# Allegro board imx6 rex_v1i1.brd
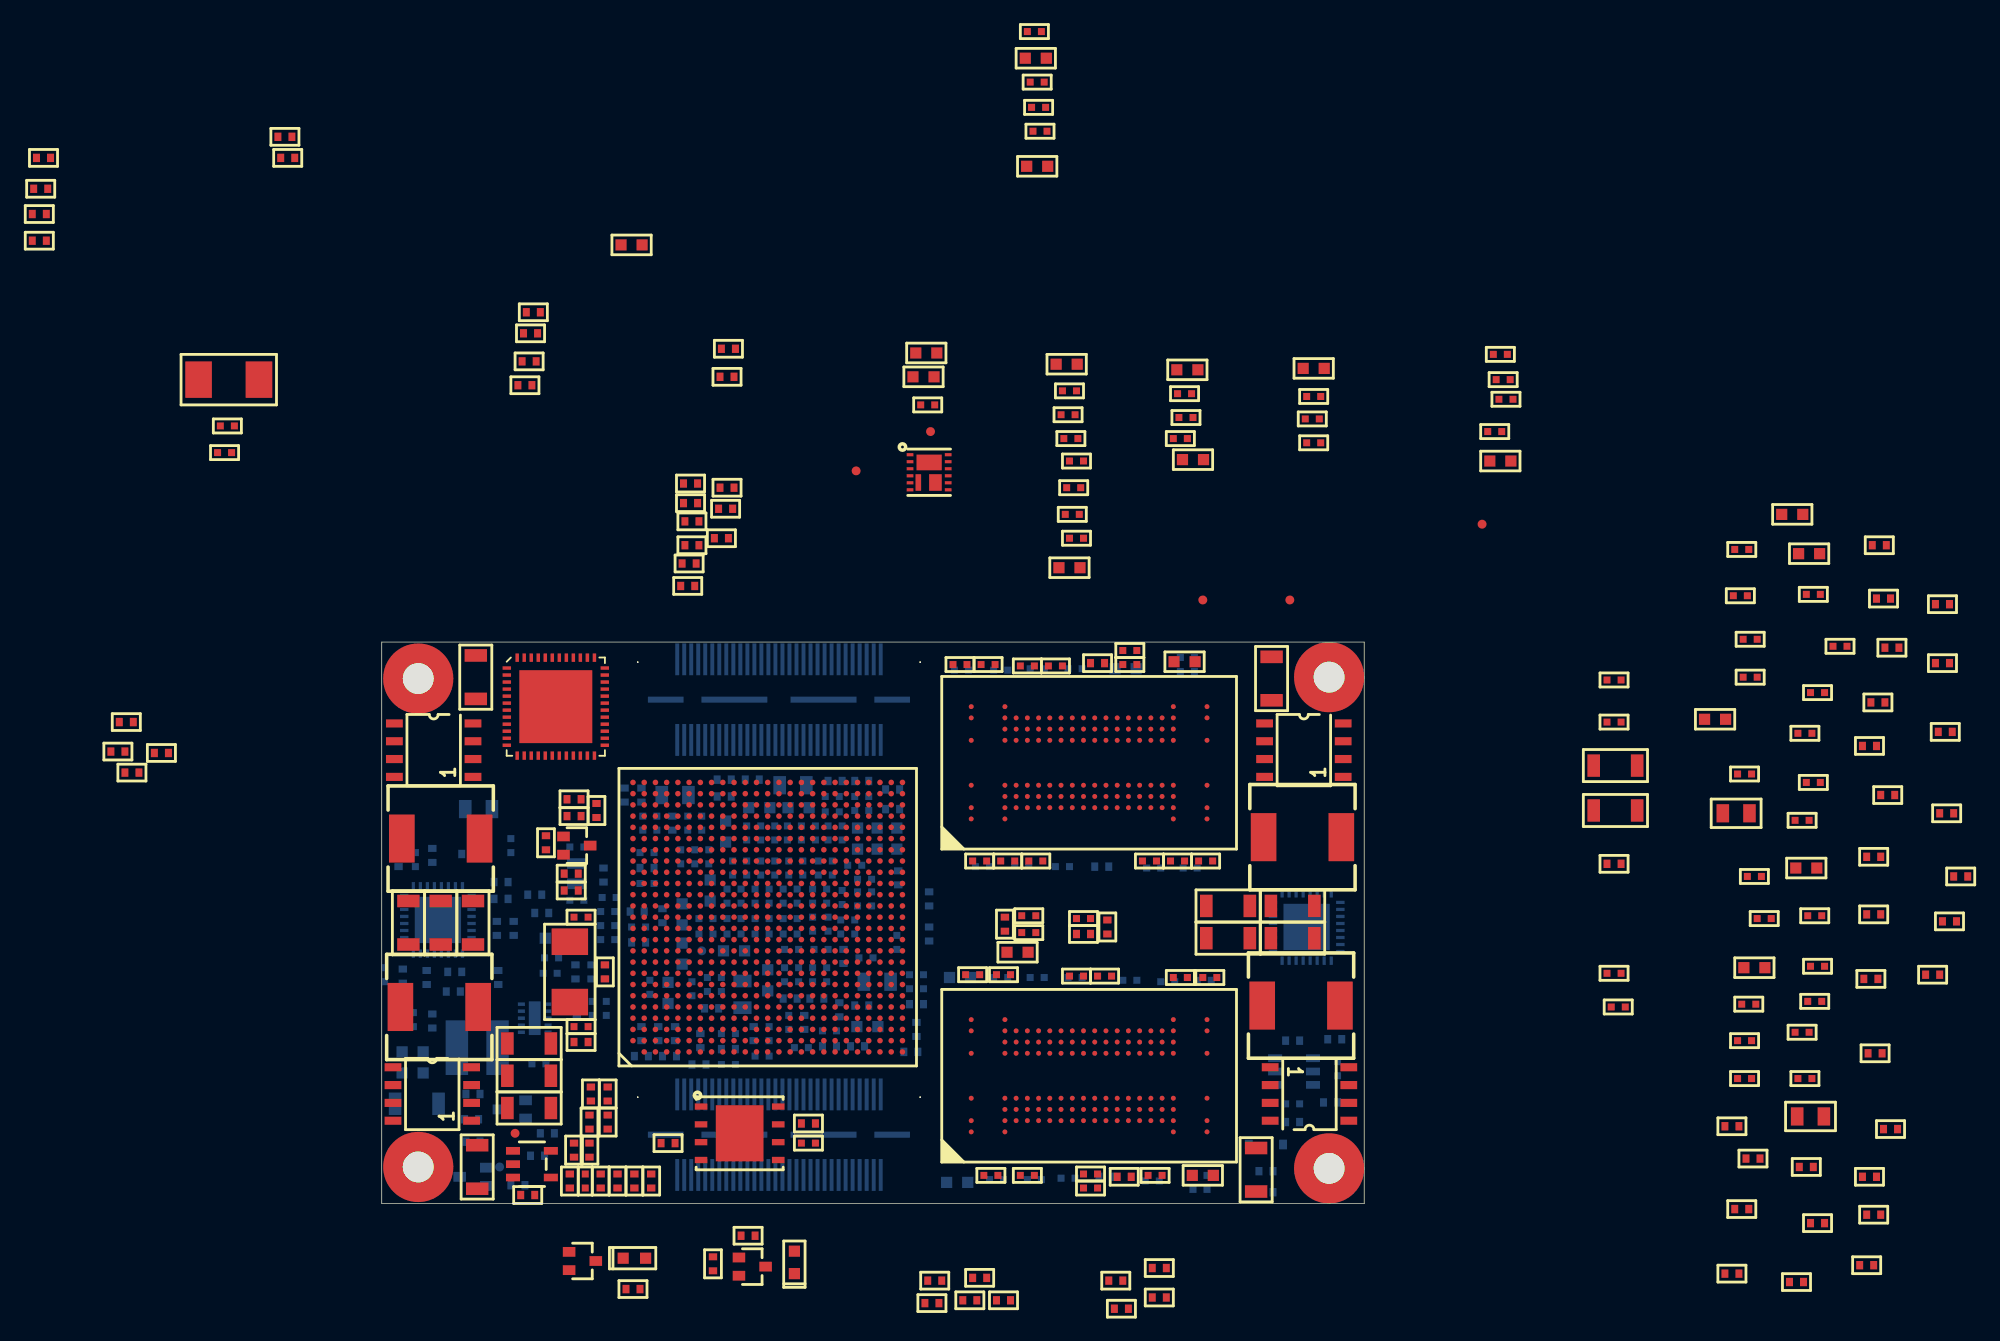
[diagram p0: board, top side]
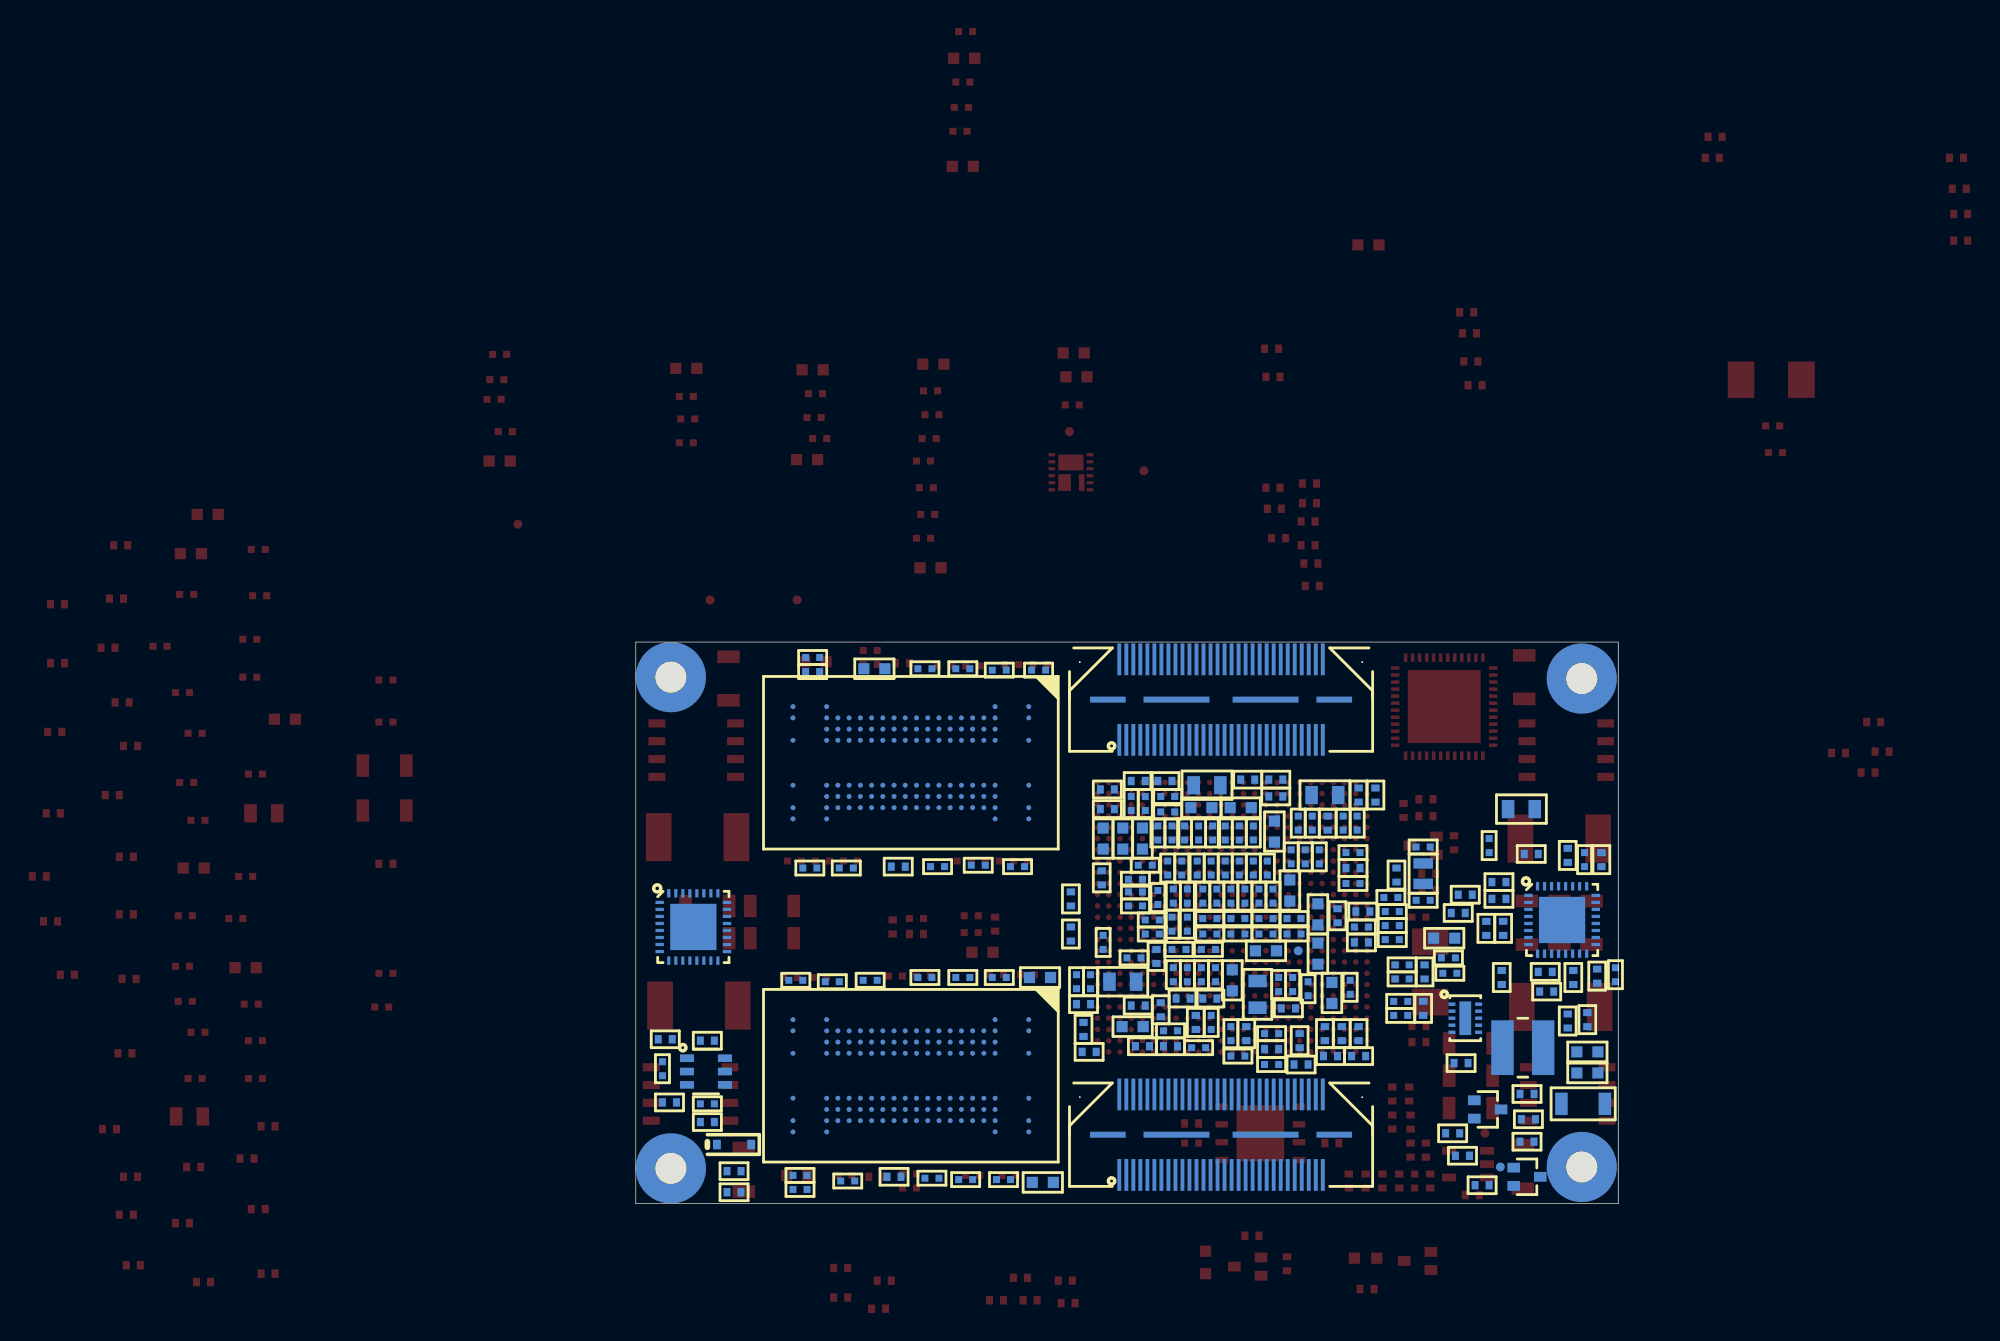
[diagram p1: board, bottom side, seen from below]

Outline 70 x 40 mm; copper layers: TOP, BOTTOM. Coordinates in mm from the lower left corner of the outline.
Outline path: 0,40 70,40 70,0 0,0 0,40

## Design rules (mm)
constraint set DEFAULT: min track width 0.127

## Placement (name value [footprint] x y rotation side)
C1  1u  [C0402]  88.1 14 0 top
C3  220n  [C0402]  50.5 1.1 0 top
C4  220n  [C0402]  50.5 2.1 0 top
C5  220n  [C0402]  58.3 1 180 bottom
C6  220n  [C0402]  58.3 2 180 bottom
C7  100n  [C0402]  36.7 18.6 270 bottom
C8  220n  [C0402]  53.3 38.4 0 top
C9  220n  [C0402]  53.3 39.4 0 top
C10  220n  [C0402]  57.4 37.9 0 bottom
C11  220n  [C0402]  57.4 38.9 0 bottom
C12  22u  [C0603]  41 1.5 180 bottom
C13  22u  [C0603]  41.2 16.1 180 bottom
C14  22u  [C0603]  53 38.1 180 bottom
C15  22u  [C0603]  100.5 49.1 0 top
C16  22u  [C0603]  58.5 2 0 top
C17  22u  [C0603]  57.2 38.6 0 top
C18  100n  [C0402]  96.9 46.6 0 top
C19  10u  [C0603]  101.7 46.3 0 top
C20  100n  [C0402]  96.8 43.3 0 top
C21  220n  [C0402]  43.2 38.4 0 top
C22  220n  [C0402]  41.2 38.4 0 top
C23  220n  [C0402]  58.7 24.4 0 top
C24  220n  [C0402]  56.7 24.4 0 top
C25  220n  [C0402]  54.7 24.4 0 top
C26  220n  [C0402]  46.6 24.4 0 top
C27  220n  [C0402]  44.6 24.4 0 top
C28  220n  [C0402]  42.6 24.4 0 top
C29  220n  [C0402]  46 38.3 0 top
C30  220n  [C0402]  48 38.3 0 top
C31  220n  [C0402]  57.6 23.9 180 bottom
C32  220n  [C0402]  55 23.9 180 bottom
C33  220n  [C0402]  48.5 24 180 bottom
C34  220n  [C0402]  45.6 24.1 180 bottom
C35  220n  [C0402]  42.8 24 180 bottom
C36  220n  [C0402]  102 43.4 0 top
C37  220n  [C0402]  41.3 38 180 bottom
C38  220n  [C0402]  44.1 38 180 bottom
C39  220n  [C0402]  46.7 38.1 180 bottom
C40  220n  [C0402]  49.4 38.1 180 bottom
C41  220n  [C0402]  42.1 16.3 0 top
C42  220n  [C0402]  44.3 16.3 0 top
C43  220n  [C0402]  49.5 16.2 0 top
C44  220n  [C0402]  51.5 16.2 0 top
C45  220n  [C0402]  56.9 16.1 0 top
C46  220n  [C0402]  59 16.1 0 top
C47  220n  [C0402]  97.5 40.2 0 top
C48  220n  [C0402]  43.4 2 0 top
C49  220n  [C0402]  46 2 0 top
C50  220n  [C0402]  55.1 2 0 top
C51  220n  [C0402]  58.6 15.9 180 bottom
C52  220n  [C0402]  56 15.8 180 bottom
C53  220n  [C0402]  53.3 15.9 180 bottom
C54  220n  [C0402]  54.9 1.6 180 bottom
C55  220n  [C0402]  48.9 1.8 180 bottom
C56  220n  [C0402]  46.5 1.7 180 bottom
C57  220n  [C0402]  43.8 1.7 180 bottom
C58  220n  [C0402]  44.1 16.1 180 bottom
C59  220n  [C0402]  46.7 16.1 180 bottom
C60  220n  [C0402]  49.4 16.1 180 bottom
C61  220n  [C0402]  46.1 19.3 0 top
C62  220n  [C0402]  103.9 39.7 0 top
C63  100n  [C0402]  15.5 14.4 180 bottom
C64  220n  [C0402]  97.5 37.5 0 top
C65  100n  [C0402]  15.5 13.4 180 bottom
C66  100n  [C0402]  15.4 17 180 bottom
C67  100n  [C0402]  15.4 16 180 bottom
C68  220n  [C0402]  18.3 19.7 0 bottom
C69  10n  [C0402]  16.2 21.8 180 bottom
C70  10n  [C0402]  16.1 20.8 180 bottom
C71  10n  [C0402]  16.1 19.8 180 bottom
C72  10n  [C0402]  16.1 18.8 180 bottom
C73  220n  [C0402]  18.9 22.8 180 bottom
C74  100n  [C0402]  24.7 9.9 180 bottom
C75  220n  [C0402]  27.6 12.1 270 bottom
C76  220n  [C0402]  31.9 12.3 180 bottom
C77  220n  [C0402]  37.6 15.8 90 bottom
C78  4u7  [C0402]  46.1 20.5 0 top
C79  220n  [C0402]  102.3 36.4 0 top
C80  10u  [C0603]  95 34.5 0 top
C81  220n  [C0402]  101.4 33.5 0 top
C82  220n  [C0402]  97.1 30.6 0 top
C83  18p  [C0402]  14.2 12.6 180 top
C84  18p  [C0402]  14.2 20.4 180 top
C85  18p  [C0402]  13.9 25.4 0 bottom
C86  18p  [C0402]  13.9 21.6 0 bottom
C87  100n  [C0402]  68.1 9.6 270 bottom
C88  100n  [C0402]  64.9 7.1 180 bottom
C89  100n  [C0402]  14.5 1.6 90 top
C90  220n  [C0402]  24.6 21.9 90 bottom
C91  220n  [C0402]  25.6 21.9 90 bottom
C92  220n  [C0402]  26.6 21.9 90 bottom
C93  220n  [C0402]  27.6 21.9 90 bottom
C94  220n  [C0402]  28.6 21.9 90 bottom
C95  220n  [C0402]  29.6 21.9 90 bottom
C96  22u  [C0603]  23.4 22.3 90 bottom
C97  220n  [C0402]  29.1 20.3 180 bottom
C98  220n  [C0402]  27.1 20.3 180 bottom
C99  220n  [C0402]  25.1 20.3 180 bottom
C100  220n  [C0402]  23.1 20.3 180 bottom
C101  22u  [C0603]  21.4 20.6 90 bottom
C102  220n  [C0402]  29.1 19.2 0 bottom
C103  220n  [C0402]  27.1 19.2 180 bottom
C104  220n  [C0402]  25.1 19.2 180 bottom
C105  220n  [C0402]  23.1 19.2 180 bottom
C106  22u  [C0603]  21.4 17.8 270 bottom
C107  220n  [C0402]  31.7 16.3 270 bottom
C108  220n  [C0402]  30.7 16.3 270 bottom
C109  220n  [C0402]  29.7 16.3 270 bottom
C110  220n  [C0402]  28.7 16.3 270 bottom
C111  22u  [C0603]  27.5 15.9 270 bottom
C112  220n  [C0402]  30.7 21.9 270 bottom
C113  220n  [C0402]  31.7 21.9 270 bottom
C114  220n  [C0402]  30.7 19.9 270 bottom
C115  220n  [C0402]  31.8 19.9 270 bottom
C116  220n  [C0402]  31.3 18.1 180 bottom
C117  220n  [C0402]  29.2 18.1 180 bottom
C118  22u  [C0603]  25.1 18 180 bottom
C119  220n  [C0402]  31.1 23.9 90 bottom
C120  220n  [C0402]  30 23.9 90 bottom
C121  220n  [C0402]  29 23.9 90 bottom
C122  220n  [C0402]  28 23.9 90 bottom
C123  220n  [C0402]  27 23.9 90 bottom
C124  220n  [C0402]  26 23.9 90 bottom
C125  220n  [C0402]  25 23.9 90 bottom
C126  220n  [C0402]  32.1 23.9 90 bottom
C127  22u  [C0603]  33.9 26 90 bottom
C128  22u  [C0603]  35.3 26 90 bottom
C129  22u  [C0603]  36.7 26 270 bottom
C130  220n  [C0402]  21.3 24.7 90 bottom
C131  220n  [C0402]  22.3 24.7 90 bottom
C132  220n  [C0402]  23.3 24.7 90 bottom
C133  220n  [C0402]  21.8 27.1 90 bottom
C134  220n  [C0402]  22.8 27.1 90 bottom
C135  22u  [C0603]  24.5 26.5 90 bottom
C136  220n  [C0402]  102 30 0 top
C137  22u  [C0805]  96.5 27.8 0 top
C138  220n  [C0402]  32.8 21.8 270 bottom
C139  10n  [C0402]  23.2 15.6 90 bottom
C140  220n  [C0402]  24.2 15.6 270 bottom
C141  22u  [C0805]  25.7 14.9 270 bottom
C142  220n  [C0402]  101.2 27.3 0 top
C143  220n  [C0402]  22.1 15.3 90 bottom
C144  220n  [C0402]  32.8 26.4 90 bottom
C145  220n  [C0402]  29 12.9 270 bottom
C146  220n  [C0402]  30.9 26.4 90 bottom
C147  22u  [C0805]  20.9 29.1 180 bottom
C148  22u  [C0805]  29.3 29.8 180 bottom
C149  220n  [C0402]  24.7 12.1 0 bottom
C150  220n  [C0402]  19.1 15.4 270 bottom
C151  22u  [C0603]  20.4 15 270 bottom
C152  220n  [C0402]  19.6 27.1 90 bottom
C153  220n  [C0402]  18.6 27.1 90 bottom
C154  220n  [C0402]  97.8 23.3 0 top
C155  220n  [C0402]  34.5 17.5 0 bottom
C156  22u  [C0805]  35.3 15.8 0 bottom
C157  220n  [C0402]  33.7 24.1 180 bottom
C158  220n  [C0402]  34.4 23.1 180 bottom
C159  220n  [C0402]  34.4 22.2 180 bottom
C160  220n  [C0402]  34.4 21.2 180 bottom
C161  220n  [C0402]  33.2 20.2 180 bottom
C162  220n  [C0402]  33.2 19.2 180 bottom
C163  220n  [C0402]  32.1 27.9 0 bottom
C164  220n  [C0402]  32.1 29 180 bottom
C165  220n  [C0402]  33.7 28.5 270 bottom
C166  220n  [C0402]  31.8 26.4 90 bottom
C167  220n  [C0402]  29.9 26.4 270 bottom
C168  220n  [C0402]  28.9 26.4 270 bottom
C169  220n  [C0402]  28 26.4 90 bottom
C170  220n  [C0402]  27 26.4 270 bottom
C171  220n  [C0402]  26 26.4 270 bottom
C172  22u  [C0603]  26.9 28.2 180 bottom
C173  22u  [C0603]  29.7 28.2 180 bottom
C174  220n  [C0402]  34.7 28.5 270 bottom
C175  22pF  [C0402]  -11 55.4 0 top
C176  22pF  [C0402]  -11.2 53.5 0 top
C177  10u  [C0603]  38.8 60.6 0 top
C178  10u  [C0603]  38.6 58.9 0 top
C179  560pF  [C0402]  38.9 56.9 0 top
C180  10u  [C0603]  48.8 59.8 0 top
C181  100n  [C0402]  49 57.9 0 top
C182  10n  [C0402]  48.9 56.2 0 top
C183  10n  [C0402]  49.1 54.5 0 top
C184  10n  [C0402]  49.5 52.9 0 top
C185  10n  [C0402]  49.3 51 0 top
C186  10u  [C0603]  57.4 59.4 0 top
C187  100n  [C0402]  57.2 57.7 0 top
C188  10n  [C0402]  57.3 56 0 top
C189  10n  [C0402]  56.9 54.5 0 top
C190  100n  [C0402]  46.5 83.5 0 top
C191  10u  [C0603]  66.4 59.5 0 top
C192  100n  [C0402]  66.4 57.5 0 top
C193  10n  [C0402]  66.3 55.9 0 top
C194  10u  [C0603]  101.5 23.9 0 top
C195  100n  [C0402]  79.7 60.5 0 top
C196  10n  [C0402]  79.9 58.7 0 top
C197  10n  [C0402]  80.1 57.3 0 top
C198  10n  [C0402]  79.3 55 0 top
C199  10u  [C0603]  46.6 81.6 0 top
C200  10n  [C0402]  46.7 79.9 0 top
C201  10n  [C0402]  46.8 78.1 0 top
C202  10n  [C0402]  46.9 76.4 0 top
C203  100n  [C0402]  30.4 4.3 0 top
C204  10u  [C0603]  12.4 18.9 180 bottom
C205  100n  [C0402]  12.1 17.5 180 bottom
C206  1u  [C0402]  9.2 25.5 270 bottom
C207  1u  [C0402]  12 16.4 180 bottom
C211  100n  [C0402]  0.2 16.3 270 bottom
C212  100n  [C0402]  2.4 24.5 270 bottom
C218  10n  [C0402]  98.5 20.3 0 top
C219  100n  [C0402]  102.1 20.5 0 top
C221  10u  [C0603]  2.2 10.8 180 bottom
C222  10u  [C0603]  2.2 9.3 180 bottom
C223  10u  [C0603]  97.8 16.8 0 top
C224  100n  [C0402]  102.3 16.9 0 top
C225  1u  [C0402]  97.4 14.2 0 top
C226  1u  [C0402]  102.1 14.4 0 top
C230  100n  [C0402]  101.2 12.2 0 top
C231  100n  [C0402]  97.1 11.6 0 top
C237  10n  [C0402]  97.1 8.9 0 top
C238  100n  [C0402]  101.4 8.9 0 top
C239  100n  [C0402]  87.8 37.3 0 top
C240  100n  [C0402]  87.8 34.3 0 top
C242  100n  [C0402]  87.8 16.4 0 top
C243  4u7  [C0402]  38.6 15.8 270 bottom
C244  4u7  [C0402]  50 20.3 0 top
C245  4u7  [C0402]  18.9 25 180 bottom
C246  4u7  [C0402]  27.1 10.5 180 bottom
C247  4u7  [C0402]  29.9 11.1 180 bottom
C248  10n  [C0402]  49.2 49.1 0 top
C249  10n  [C0402]  49.5 47.4 0 top
C250  10uF  [C1206]  87.9 31.2 0 top
C251  10uF  [C1206]  87.9 28 0 top
C252  1uF  [C0805]  6.9 28.1 180 bottom
C253  10uF  [C1206]  6.7 37.5 90 top
C254  10uF  [C1206]  6.8 2.6 270 top
C255  10uF  [C1206]  2.5 7.1 180 bottom
C256  1uF  [C0805]  101.8 6.2 0 top
C257  10uF  [C1206]  62.3 2.4 270 top
C258  10uF  [C1206]  63.4 37.4 90 top
C259  100u  [C1206]  6.5 20 270 top
C260  100u  [C1206]  1.9 20 270 top
C261  100u  [C1206]  4.2 20 270 top
C262  100u  [C1206]  10.5 6.8 0 top
C263  100u  [C1206]  10.5 9.1 0 top
C264  100u  [C1206]  10.5 11.4 0 top
C265  100u  [C1206]  60.3 18.9 180 top
C266  100u  [C1206]  64.9 18.9 0 top
C267  100u  [C1206]  60.3 21.2 180 top
C268  100u  [C1206]  64.9 21.2 0 top
D1  RB751V-40-TP  [SOD323]  63 4.2 180 bottom
D2  Green  [LED_0603]  18 -3.9 0 top
D3  Orange  [LED_0603]  29.4 -4.2 90 top
FB1  220R, 2.5A  [C0603]  45.3 17.9 0 top
FB2  220R, 2.5A  [C0603]  34.6 12.6 0 bottom
FB3  BLM18KG101TN1D  [C0603]  49 45.3 0 top
FB4  BLM18KG101TN1D  [C0603]  57.8 53 0 top
FB5  BLM15AX601SN1D  [C0402]  66.4 54.2 0 top
FB6  BLM18KG101TN1D  [C0603]  79.7 52.9 0 top
FB7  BLM18KG101TN1D  [C0603]  46.7 73.9 0 top
FB8  220R, 2.5A  [C0603]  17.8 68.3 0 top
J1  NA  [QSH-030-01-L-D-A]  28.3 35.9 90 bottom
J2  NA  [QSH-030-01-L-D-A]  28.3 4.9 90 bottom
L2  3u3  [IHLP_255MILX270MIL]  4.1 14 0 top
L3  VLCF4020T-100MR85  [VLCF4020]  6.8 11.1 180 bottom
L4  3u3  [IHLP_255MILX270MIL]  65.5 14.1 0 top
L5  3u3  [IHLP_255MILX270MIL]  65.6 26.1 180 top
L6  4u7  [IHLP_255MILX270MIL]  4.2 26 0 top
MH1  MH_5MMC_2.2MMD  [MH_5MMD_2_2MMD]  2.6 37.4 0 top
MH2  MH_5MMC_2.2MMD  [MH_5MMD_2_2MMD]  67.5 37.5 0 top
MH3  MH_5MMC_2.2MMD  [MH_5MMD_2_2MMD]  67.5 2.5 0 top
MH4  MH_5MMC_2.2MMD  [MH_5MMD_2_2MMD]  2.6 2.6 0 top
Q1  2N7002BKW,115  [SC70_SOT323]  14.3 -4.1 0 top
Q2  2N7002BKW,115  [SC70_SOT323]  26.4 -4.5 0 top
Q3  SI4816BDY-T1-GE3  [8_SOIC_3_9MM]  3.7 32.3 0 top
Q4  SI4816BDY-T1-GE3  [8_SOIC_3_9MM]  3.6 7.8 0 top
Q5  2N7002BKW,115  [SC70_SOT323]  6.5 1.9 180 bottom
Q6  SI4816BDY-T1-GE3  [8_SOIC_3_9MM]  65.7 32.3 0 top
Q7  SI4816BDY-T1-GE3  [8_SOIC_3_9MM]  66.1 7.8 180 top
Q8  2N7002BKW,115  [SC70_SOT323]  9.3 6.7 180 bottom
Q9  2N7002BKW,115  [SC70_SOT323]  13.9 25.5 0 top
R1  22R  [R0402]  26.4 30.2 180 bottom
R2  200R  [R0402]  39 21.7 270 bottom
R3  200R  [R0402]  39 19.2 270 bottom
R4  240R  [R0402]  52.9 1.9 0 top
R5  240R  [R0402]  51.6 1.9 180 bottom
R8  240R  [R0402]  51 38.5 0 top
R9  240R  [R0402]  51.3 24 180 bottom
R10  240R  [R0402]  36.8 23.2 90 bottom
R11  240R  [R0402]  96.2 5.5 0 top
R12  240R  [R0402]  97.7 3.2 0 top
R13  0R  [R0402]  44.4 19.9 90 top
R14  0R  [R0402]  50 19.2 0 top
R15  200R  [R0402]  51.7 19.7 90 top
R16  49R9  [R0402]  13.8 16.5 270 bottom
R17  49R9  [R0402]  13.9 13.9 270 bottom
R18  0R  [R0402]  18.2 20.8 180 bottom
R19  0R  [R0402]  18.9 23.9 180 bottom
R20  191R  [R0402]  18.3 18.6 180 bottom
R21  47k  [R0402]  20.5 10.5 180 bottom
R22  47k  [R0402]  18.5 10.5 180 bottom
R23  0R  [R0402]  26.5 12.1 270 bottom
R24  0R  [R0402]  37.7 10.8 180 bottom
R25  0R  [R0402]  38.1 12.4 270 bottom
R26  0R  [R0402]  22.6 9.9 180 bottom
R27  0R  [R0402]  31.9 11.2 180 bottom
R28  4k99  [R0402]  31 14.6 180 bottom
R29  4k99  [R0402]  29.1 14.6 180 bottom
R30  1k6  [R0402]  33.9 11.2 180 bottom
R31  4k99  [R0402]  18 1.6 90 top
R32  4k99  [R0402]  16.8 1.6 90 top
R34  0R  [R0402]  38.1 14.2 180 bottom
R35  22R  [R0402]  24.7 60.9 0 top
R36  22R  [R0402]  10.8 63.5 0 top
R37  2M2  [R0402]  14.2 11.5 180 top
R44  4k99  [R0402]  55.4 -4.6 0 top
R45  4k99  [R0402]  55.4 -6.7 0 top
R46  4k99  [R0402]  -18.8 32.2 0 top
R47  4k99  [R0402]  -15.7 32.1 0 top
R50  22R  [R0402]  24.4 30.2 180 bottom
R51  0R  [R0402]  63 2.3 180 bottom
R52  22R  [R0402]  39.4 -5.5 0 top
R53  10M  [R0402]  15.9 16.5 90 top
R54  10M  [R0402]  15.8 23.4 270 bottom
R55  4k99  [R0402]  13.7 27.6 0 top
R56  4k99  [R0402]  13.5 23.5 0 top
R59  4k99  [R0402]  64.9 11.6 180 bottom
R61  1k  [R0402]  101.5 2.6 0 top
R65  0R  [R0402]  63 0.8 180 bottom
R66  22R  [R0402]  39.2 -7.1 0 top
R70  0R  [R0402]  67.6 7.2 180 bottom
R71  0R  [R0402]  13.4 1.6 90 top
R72  22R  [R0402]  -18.2 34.3 0 top
R73  100k  [R0402]  20 20.5 90 bottom
R74  0R  [R0402]  34.2 14.1 0 bottom
R76  0R  [R0402]  30.1 12.9 270 bottom
R77  2R2  [R0402]  19.7 12.1 90 bottom
R78  0R  [R0402]  24.7 11 180 bottom
R80  0R  [R0402]  20.7 27.1 270 bottom
R81  220R  [R0402]  10.6 62 0 top
R82  220R  [R0402]  10.5 60 0 top
R83  22R  [R0402]  102.3 -1.4 0 top
R84  4k99  [R0402]  10.2 58.3 0 top
R85  22R  [R0402]  -6.9 76 0 top
R86  22R  [R0402]  -6.7 74.5 0 top
R87  4k99  [R0402]  -24.1 74.5 0 top
R88  0R  [R0402]  24.6 58.9 0 top
R89  4k99  [R0402]  -24.3 72.3 0 top
R90  22R  [R0402]  16.1 7.8 90 top
R92  22R  [R0402]  14.9 7.8 90 top
R93  0R  [R0402]  6.5 7.8 180 bottom
R99  1k  [R0402]  22 51.3 0 top
R101  1k  [R0402]  22 49.9 0 top
R102  1k  [R0402]  22.1 48.6 0 top
R105  0R  [R0402]  20.9 12.1 270 bottom
R106  0R  [R0402]  11.2 10 180 bottom
R107  0R  [R0402]  3.6 13 90 bottom
R108  0R  [R0402]  2.2 13.1 90 bottom
R111  100k  [R0402]  36.4 29.5 180 bottom
R112  22R  [R0402]  52.3 -5.5 0 top
R113  220R  [R0402]  17.9 -6.1 0 top
R114  220R  [R0402]  26.1 -2.3 0 top
R116  0R  [R0402]  10.9 22 180 bottom
R117  0R  [R0402]  96.9 -0.4 0 top
R119  14K  [R0402]  8.2 19.6 90 bottom
R120  4k99  [R0402]  6.2 24.9 180 bottom
R121  1R  [R0402]  1.2 24.5 90 bottom
R122  1R  [R0402]  1.5 16.2 90 bottom
R123  39k  [R0402]  5.1 15.1 0 bottom
R124  200k  [R0402]  106 1.9 0 top
R125  200k  [R0402]  3.2 16.1 90 bottom
R126  10k5  [R0402]  5.2 16.5 180 bottom
R128  0R  [R0402]  8.5 21.7 0 bottom
R134  12k  [R0402]  106.3 -0.8 0 top
R135  3k3  [R0402]  105.8 -4.4 0 top
R137  100k  [R0402]  36.4 28.1 180 bottom
R138  330k  [R0402]  6.4 6 180 bottom
R139  120k  [R0402]  11.1 3.4 180 bottom
R140  0R  [R0402]  100.8 -5.6 0 top
R141  0R  [R0402]  96.2 -5 0 top
R143  100k  [R0402]  32.3 30.1 180 bottom
R144  100k  [R0402]  34.2 30.1 180 bottom
R145  1R  [R0402]  107.5 5.3 0 top
R146  1R  [R0402]  106.4 10.7 0 top
R147  27k  [R0402]  106.1 16 0 top
R148  200k  [R0402]  106.3 20.6 0 top
R149  200k  [R0402]  106.3 24.7 0 top
R150  10k5  [R0402]  107.3 29.1 0 top
R152  0R  [R0402]  106 32.6 0 top
R156  0R  [R0402]  106.6 35.7 0 top
R157  0R  [R0402]  107.6 39.6 0 top
R159  22R  [R0402]  52.7 -7.5 0 top
R160  22R  [R0402]  -17.8 30.7 0 top
R161  22R  [R0402]  22.7 11.6 270 bottom
R162  1k  [R0402]  -24.4 70.5 0 top
R163  0R  [R0402]  107 43.1 0 top
R164  0R  [R0402]  106.7 46.9 0 top
R165  10k  [R0402]  32.9 17.6 90 bottom
R166  10k  [R0402]  32.6 13.8 90 bottom
R167  10k  [R0402]  15.6 1.6 90 top
R168  10k  [R0402]  111.2 42.7 0 top
R169  10k  [R0402]  24.4 29 180 bottom
R170  10k  [R0402]  18.5 29.1 270 bottom
R171  10k  [R0402]  17.3 29.1 270 bottom
R172  10k  [R0402]  42.6 -5.3 0 top
R173  10k  [R0402]  41.9 -6.9 0 top
R174  10k  [R0402]  44.3 -6.9 0 top
R175  10k  [R0402]  23.5 13.9 180 bottom
R176  10k  [R0402]  111.2 38.5 0 top
R177  10k  [R0402]  13.7 28.8 0 top
R178  10k  [R0402]  15.3 28 90 top
R179  10k  [R0402]  13.5 22.3 0 top
R180  10k  [R0402]  11.7 25.7 270 top
R181  10k  [R0402]  67.9 11.7 180 bottom
R182  10k  [R0402]  19.2 1.6 90 top
R183  10k  [R0402]  64.9 5.8 180 bottom
R184  10k  [R0402]  10.4 0.6 0 top
R185  10k  [R0402]  13.7 3.8 90 top
R186  10k  [R0402]  16.1 5.8 90 top
R187  10k  [R0402]  14.8 5.8 90 top
R188  10k  [R0402]  14.8 3.8 90 top
R189  10k  [R0402]  18.5 12.1 90 bottom
R190  10k  [R0402]  -24.4 68.6 0 top
R191  10k  [R0402]  22.1 46.9 0 top
R192  10k  [R0402]  21.9 45.6 0 top
R193  10k  [R0402]  21.8 44 0 top
R194  10k  [R0402]  24.6 51 0 top
R195  10k  [R0402]  24.5 49.5 0 top
R196  10k  [R0402]  24.2 47.4 0 top
R197  10k  [R0402]  30.4 5.7 0 top
R198  10k  [R0402]  20.4 4.3 0 top
R199  10k  [R0402]  23.6 -4.3 90 top
R200  10k  [R0402]  11.4 20.7 180 bottom
R201  10k  [R0402]  8.3 16.1 270 bottom
R202  10k  [R0402]  3.6 24.8 90 bottom
R203  10k  [R0402]  11.8 5 180 bottom
R204  10k  [R0402]  9.7 1.3 180 bottom
R205  10k  [R0402]  6.5 4.4 180 bottom
R206  10k  [R0402]  8.5 22.9 180 bottom
R207  10k  [R0402]  9.4 19.6 90 bottom
R208  10k  [R0402]  111.4 33.6 0 top
R209  10k  [R0402]  111.5 27.8 0 top
R210  10k  [R0402]  112.5 23.3 0 top
R211  10k  [R0402]  111.7 20.1 0 top
R212  10k  [R0402]  110.5 16.3 0 top
R213  10k  [R0402]  87.8 24.2 0 top
TP3  TP_25MILC_TP3  [TP_25C]  22.8 18 180 bottom
TP5  TP_25MILC_TP5  [TP_25C]  39.1 55 0 top
TP6  TP_25MILC_TP6  [TP_25C]  33.8 52.2 0 top
TP7  TP_25MILC_TP7  [TP_25C]  9.5 5 0 top
TP8  TP_25MILC_TP8  [TP_25C]  78.4 48.4 0 top
TP9  TP_25MILC_TP9  [TP_25C]  58.5 43 0 top
TP10  TP_25MILC_TP10  [TP_25C]  64.7 43 0 top
TP11  TP_25MILC_TP11  [TP_25C]  8.4 2.6 180 bottom
U1  MCIMX6Q5EYM10AC  [PBGA624]  27.5 20.4 90 top
U2  MT41J128M16HA15EDTR  [96_FPGA_DD3]  50.4 9.1 90 top
U3  MT41J128M16HA15EDTR  [96_FPGA_DD3]  50.4 9.1 270 bottom
U4  MT41J128M16HA15EDTR  [96_FPGA_DD3]  50.4 31.4 90 top
U5  MT41J128M16HA15EDTR  [96_FPGA_DD3]  50.4 31.4 270 bottom
U6  TPS3808G09DBVR_U6  [DBV_SOT_23_6]  65 9.4 180 bottom
U7  SN74AHC1G09DBVR  [DBV_SOT_23_5]  10.7 2.8 0 top
U8  KSZ9021RN  [QFN48_7MMX7MM]  12.4 35.4 0 top
U9  MIC33050-4YHL TR  [MLF_3X3_12PINS]  39 52.1 0 top
U10  SST25VF016B-75-4I-QAF-ND  [WSON8_6X5MM]  25.5 5 0 top
U11  ISL6236AIRZ  [32_VFQFN_EXPOSED_PAD]  4 20.2 180 bottom
U12  TPS62175DQCT_U12  [DQC_PWSON-N10]  10.9 13.2 180 bottom
U13  ISL6236AIRZ  [32_VFQFN_EXPOSED_PAD]  65.9 19.7 180 bottom
Y1  24MHz  [ABM7_V1_1]  13.4 16.5 90 top
Y2  32.768kHz  [ABS06]  13.9 23.5 270 bottom
Y3  25MHz  [ABM7_V1_1]  -10.9 58.7 0 top

## Library data of the parts
C1 = C1005X5R1C105K_C1: User Part Number: .PARTNO; Tolerance: .TOL
C3 = C1005X5R1E224M_C3: User Part Number: .PARTNO; Tolerance: .TOL
C4 = C1005X5R1E224M_C4: User Part Number: .PARTNO; Tolerance: .TOL
C5 = C1005X5R1E224M_C5: User Part Number: .PARTNO; Tolerance: .TOL
C6 = C1005X5R1E224M_C6: User Part Number: .PARTNO; Tolerance: .TOL
C7 = C1005X5R1H104K_C7: User Part Number: .PARTNO; Tolerance: .TOL
C8 = C1005X5R1E224M_C8: User Part Number: .PARTNO; Tolerance: .TOL
C9 = C1005X5R1E224M_C9: User Part Number: .PARTNO; Tolerance: .TOL
C10 = C1005X5R1E224M_C10: User Part Number: .PARTNO; Tolerance: .TOL
C11 = C1005X5R1E224M_C11: User Part Number: .PARTNO; Tolerance: .TOL
C12-C17 C96 C101 C106 C111 C118 C127-C129 C135 C151 C172 C173 = GRM188R60G226MEA0L: User Part Number: .PARTNO; Tolerance: .TOL
C18 = C1005X5R1H104K_C18: User Part Number: .PARTNO; Tolerance: .TOL
C19 = C1608X5R0J106M_C19: User Part Number: .PARTNO; Tolerance: .TOL
C20 = C1005X5R1H104K_C20: User Part Number: .PARTNO; Tolerance: .TOL
C21 = C1005X5R1E224M_C21: User Part Number: .PARTNO; Tolerance: .TOL
C22 = C1005X5R1E224M_C22: User Part Number: .PARTNO; Tolerance: .TOL
C23 = C1005X5R1E224M_C23: User Part Number: .PARTNO; Tolerance: .TOL
C24 = C1005X5R1E224M_C24: User Part Number: .PARTNO; Tolerance: .TOL
C25 = C1005X5R1E224M_C25: User Part Number: .PARTNO; Tolerance: .TOL
C26 = C1005X5R1E224M_C26: User Part Number: .PARTNO; Tolerance: .TOL
C27 = C1005X5R1E224M_C27: User Part Number: .PARTNO; Tolerance: .TOL
C28 = C1005X5R1E224M_C28: User Part Number: .PARTNO; Tolerance: .TOL
C29 = C1005X5R1E224M_C29: User Part Number: .PARTNO; Tolerance: .TOL
C30 = C1005X5R1E224M_C30: User Part Number: .PARTNO; Tolerance: .TOL
C31 = C1005X5R1E224M_C31: User Part Number: .PARTNO; Tolerance: .TOL
C32 = C1005X5R1E224M_C32: User Part Number: .PARTNO; Tolerance: .TOL
C33 = C1005X5R1E224M_C33: User Part Number: .PARTNO; Tolerance: .TOL
C34 = C1005X5R1E224M_C34: User Part Number: .PARTNO; Tolerance: .TOL
C35 = C1005X5R1E224M_C35: User Part Number: .PARTNO; Tolerance: .TOL
C36 = C1005X5R1E224M_C36: User Part Number: .PARTNO; Tolerance: .TOL
C37 = C1005X5R1E224M_C37: User Part Number: .PARTNO; Tolerance: .TOL
C38 = C1005X5R1E224M_C38: User Part Number: .PARTNO; Tolerance: .TOL
C39 = C1005X5R1E224M_C39: User Part Number: .PARTNO; Tolerance: .TOL
C40 = C1005X5R1E224M_C40: User Part Number: .PARTNO; Tolerance: .TOL
C41 = C1005X5R1E224M_C41: User Part Number: .PARTNO; Tolerance: .TOL
C42 = C1005X5R1E224M_C42: User Part Number: .PARTNO; Tolerance: .TOL
C43 = C1005X5R1E224M_C43: User Part Number: .PARTNO; Tolerance: .TOL
C44 = C1005X5R1E224M_C44: User Part Number: .PARTNO; Tolerance: .TOL
C45 = C1005X5R1E224M_C45: User Part Number: .PARTNO; Tolerance: .TOL
C46 = C1005X5R1E224M_C46: User Part Number: .PARTNO; Tolerance: .TOL
C47 = C1005X5R1E224M_C47: User Part Number: .PARTNO; Tolerance: .TOL
C48 = C1005X5R1E224M_C48: User Part Number: .PARTNO; Tolerance: .TOL
C49 = C1005X5R1E224M_C49: User Part Number: .PARTNO; Tolerance: .TOL
C50 = C1005X5R1E224M_C50: User Part Number: .PARTNO; Tolerance: .TOL
C51 = C1005X5R1E224M_C51: User Part Number: .PARTNO; Tolerance: .TOL
C52 = C1005X5R1E224M_C52: User Part Number: .PARTNO; Tolerance: .TOL
C53 = C1005X5R1E224M_C53: User Part Number: .PARTNO; Tolerance: .TOL
C54 = C1005X5R1E224M_C54: User Part Number: .PARTNO; Tolerance: .TOL
C55 = C1005X5R1E224M_C55: User Part Number: .PARTNO; Tolerance: .TOL
C56 = C1005X5R1E224M_C56: User Part Number: .PARTNO; Tolerance: .TOL
C57 = C1005X5R1E224M_C57: User Part Number: .PARTNO; Tolerance: .TOL
C58 = C1005X5R1E224M_C58: User Part Number: .PARTNO; Tolerance: .TOL
C59 = C1005X5R1E224M_C59: User Part Number: .PARTNO; Tolerance: .TOL
C60 = C1005X5R1E224M_C60: User Part Number: .PARTNO; Tolerance: .TOL
C61 = C1005X5R1E224M_C61: User Part Number: .PARTNO; Tolerance: .TOL
C62 = C1005X5R1E224M_C62: User Part Number: .PARTNO; Tolerance: .TOL
C63 = C1005X5R1H104K_C63: User Part Number: .PARTNO; Tolerance: .TOL
C64 = C1005X5R1E224M_C64: User Part Number: .PARTNO; Tolerance: .TOL
C65 = C1005X5R1H104K_C65: User Part Number: .PARTNO; Tolerance: .TOL
C66 = C1005X5R1H104K_C66: User Part Number: .PARTNO; Tolerance: .TOL
C67 = C1005X5R1H104K_C67: User Part Number: .PARTNO; Tolerance: .TOL
C68 = C1005X5R1E224M_C68: User Part Number: .PARTNO; Tolerance: .TOL
C69 = C1005X7R1C103K_C69: User Part Number: .PARTNO; Tolerance: .TOL
C70 = C1005X7R1C103K_C70: User Part Number: .PARTNO; Tolerance: .TOL
C71 = C1005X7R1C103K_C71: User Part Number: .PARTNO; Tolerance: .TOL
C72 = C1005X7R1C103K_C72: User Part Number: .PARTNO; Tolerance: .TOL
C73 = C1005X5R1E224M_C73: User Part Number: .PARTNO; Tolerance: .TOL
C74 = C1005X5R1H104K_C74: User Part Number: .PARTNO; Tolerance: .TOL
C75 = C1005X5R1E224M_C75: User Part Number: .PARTNO; Tolerance: .TOL
C76 = C1005X5R1E224M_C76: User Part Number: .PARTNO; Tolerance: .TOL
C77 = C1005X5R1E224M_C77: User Part Number: .PARTNO; Tolerance: .TOL
C78 = C1005X5R1A475M_C78: User Part Number: .PARTNO; Tolerance: .TOL
C79 = C1005X5R1E224M_C79: User Part Number: .PARTNO; Tolerance: .TOL
C80 = C1608X5R0J106M_C80: User Part Number: .PARTNO; Tolerance: .TOL
C81 = C1005X5R1E224M_C81: User Part Number: .PARTNO; Tolerance: .TOL
C82 = C1005X5R1E224M_C82: User Part Number: .PARTNO; Tolerance: .TOL
C83 = C1005C0G1H180J_C83: User Part Number: .PARTNO; Tolerance: .TOL
C84 = C1005C0G1H180J_C84: User Part Number: .PARTNO; Tolerance: .TOL
C85 = C1005C0G1H180J_C85: User Part Number: .PARTNO; Tolerance: .TOL
C86 = C1005C0G1H180J_C86: User Part Number: .PARTNO; Tolerance: .TOL
C87 = C1005X5R1H104K_C87: User Part Number: .PARTNO; Tolerance: .TOL
C88 = C1005X5R1H104K_C88: User Part Number: .PARTNO; Tolerance: .TOL
C89 = C1005X5R1H104K_C89: User Part Number: .PARTNO; Tolerance: .TOL
C90 = C1005X5R1E224M_C90: User Part Number: .PARTNO; Tolerance: .TOL
C91 = C1005X5R1E224M_C91: User Part Number: .PARTNO; Tolerance: .TOL
C92 = C1005X5R1E224M_C92: User Part Number: .PARTNO; Tolerance: .TOL
C93 = C1005X5R1E224M_C93: User Part Number: .PARTNO; Tolerance: .TOL
C94 = C1005X5R1E224M_C94: User Part Number: .PARTNO; Tolerance: .TOL
C95 = C1005X5R1E224M_C95: User Part Number: .PARTNO; Tolerance: .TOL
C97 = C1005X5R1E224M_C97: User Part Number: .PARTNO; Tolerance: .TOL
C98 = C1005X5R1E224M_C98: User Part Number: .PARTNO; Tolerance: .TOL
C99 = C1005X5R1E224M_C99: User Part Number: .PARTNO; Tolerance: .TOL
C100 = C1005X5R1E224M_C100: User Part Number: .PARTNO; Tolerance: .TOL
C102 = C1005X5R1E224M_C102: User Part Number: .PARTNO; Tolerance: .TOL
C103 = C1005X5R1E224M_C103: User Part Number: .PARTNO; Tolerance: .TOL
C104 = C1005X5R1E224M_C104: User Part Number: .PARTNO; Tolerance: .TOL
C105 = C1005X5R1E224M_C105: User Part Number: .PARTNO; Tolerance: .TOL
C107 = C1005X5R1E224M_C107: User Part Number: .PARTNO; Tolerance: .TOL
C108 = C1005X5R1E224M_C108: User Part Number: .PARTNO; Tolerance: .TOL
C109 = C1005X5R1E224M_C109: User Part Number: .PARTNO; Tolerance: .TOL
C110 = C1005X5R1E224M_C110: User Part Number: .PARTNO; Tolerance: .TOL
C112 = C1005X5R1E224M_C112: User Part Number: .PARTNO; Tolerance: .TOL
C113 = C1005X5R1E224M_C113: User Part Number: .PARTNO; Tolerance: .TOL
C114 = C1005X5R1E224M_C114: User Part Number: .PARTNO; Tolerance: .TOL
C115 = C1005X5R1E224M_C115: User Part Number: .PARTNO; Tolerance: .TOL
C116 = C1005X5R1E224M_C116: User Part Number: .PARTNO; Tolerance: .TOL
C117 = C1005X5R1E224M_C117: User Part Number: .PARTNO; Tolerance: .TOL
C119 = C1005X5R1E224M_C119: User Part Number: .PARTNO; Tolerance: .TOL
C120 = C1005X5R1E224M_C120: User Part Number: .PARTNO; Tolerance: .TOL
C121 = C1005X5R1E224M_C121: User Part Number: .PARTNO; Tolerance: .TOL
C122 = C1005X5R1E224M_C122: User Part Number: .PARTNO; Tolerance: .TOL
C123 = C1005X5R1E224M_C123: User Part Number: .PARTNO; Tolerance: .TOL
C124 = C1005X5R1E224M_C124: User Part Number: .PARTNO; Tolerance: .TOL
C125 = C1005X5R1E224M_C125: User Part Number: .PARTNO; Tolerance: .TOL
C126 = C1005X5R1E224M_C126: User Part Number: .PARTNO; Tolerance: .TOL
C130 = C1005X5R1E224M_C130: User Part Number: .PARTNO; Tolerance: .TOL
C131 = C1005X5R1E224M_C131: User Part Number: .PARTNO; Tolerance: .TOL
C132 = C1005X5R1E224M_C132: User Part Number: .PARTNO; Tolerance: .TOL
C133 = C1005X5R1E224M_C133: User Part Number: .PARTNO; Tolerance: .TOL
C134 = C1005X5R1E224M_C134: User Part Number: .PARTNO; Tolerance: .TOL
C136 = C1005X5R1E224M_C136: User Part Number: .PARTNO; Tolerance: .TOL
C137 = C2012X5R1C226K_C137: User Part Number: .PARTNO; Tolerance: .TOL
C138 = C1005X5R1E224M_C138: User Part Number: .PARTNO; Tolerance: .TOL
C139 = C1005X7R1C103K_C139: User Part Number: .PARTNO; Tolerance: .TOL
C140 = C1005X5R1E224M_C140: User Part Number: .PARTNO; Tolerance: .TOL
C141 = C2012X5R1C226K_C141: User Part Number: .PARTNO; Tolerance: .TOL
C142 = C1005X5R1E224M_C142: User Part Number: .PARTNO; Tolerance: .TOL
C143 = C1005X5R1E224M_C143: User Part Number: .PARTNO; Tolerance: .TOL
C144 = C1005X5R1E224M_C144: User Part Number: .PARTNO; Tolerance: .TOL
C145 = C1005X5R1E224M_C145: User Part Number: .PARTNO; Tolerance: .TOL
C146 = C1005X5R1E224M_C146: User Part Number: .PARTNO; Tolerance: .TOL
C147 = C2012X5R1C226K_C147: User Part Number: .PARTNO; Tolerance: .TOL
C148 = C2012X5R1C226K_C148: User Part Number: .PARTNO; Tolerance: .TOL
C149 = C1005X5R1E224M_C149: User Part Number: .PARTNO; Tolerance: .TOL
C150 = C1005X5R1E224M_C150: User Part Number: .PARTNO; Tolerance: .TOL
C152 = C1005X5R1E224M_C152: User Part Number: .PARTNO; Tolerance: .TOL
C153 = C1005X5R1E224M_C153: User Part Number: .PARTNO; Tolerance: .TOL
C154 = C1005X5R1E224M_C154: User Part Number: .PARTNO; Tolerance: .TOL
C155 = C1005X5R1E224M_C155: User Part Number: .PARTNO; Tolerance: .TOL
C156 = C2012X5R1C226K_C156: User Part Number: .PARTNO; Tolerance: .TOL
C157 = C1005X5R1E224M_C157: User Part Number: .PARTNO; Tolerance: .TOL
C158 = C1005X5R1E224M_C158: User Part Number: .PARTNO; Tolerance: .TOL
C159 = C1005X5R1E224M_C159: User Part Number: .PARTNO; Tolerance: .TOL
C160 = C1005X5R1E224M_C160: User Part Number: .PARTNO; Tolerance: .TOL
C161 = C1005X5R1E224M_C161: User Part Number: .PARTNO; Tolerance: .TOL
C162 = C1005X5R1E224M_C162: User Part Number: .PARTNO; Tolerance: .TOL
C163 = C1005X5R1E224M_C163: User Part Number: .PARTNO; Tolerance: .TOL
C164 = C1005X5R1E224M_C164: User Part Number: .PARTNO; Tolerance: .TOL
C165 = C1005X5R1E224M_C165: User Part Number: .PARTNO; Tolerance: .TOL
C166 = C1005X5R1E224M_C166: User Part Number: .PARTNO; Tolerance: .TOL
C167 = C1005X5R1E224M_C167: User Part Number: .PARTNO; Tolerance: .TOL
C168 = C1005X5R1E224M_C168: User Part Number: .PARTNO; Tolerance: .TOL
C169 = C1005X5R1E224M_C169: User Part Number: .PARTNO; Tolerance: .TOL
C170 = C1005X5R1E224M_C170: User Part Number: .PARTNO; Tolerance: .TOL
C171 = C1005X5R1E224M_C171: User Part Number: .PARTNO; Tolerance: .TOL
C174 = C1005X5R1E224M_C174: User Part Number: .PARTNO; Tolerance: .TOL
C175 = C1005C0G1H220J_C175: User Part Number: .PARTNO; Tolerance: .TOL
C176 = C1005C0G1H220J_C176: User Part Number: .PARTNO; Tolerance: .TOL
C177 = C1608X5R0J106M_C177: User Part Number: .PARTNO; Tolerance: .TOL
C178 = C1608X5R0J106M_C178: User Part Number: .PARTNO; Tolerance: .TOL
C179 = GRM1555C1H561JA01D_C179: User Part Number: .PARTNO; Tolerance: .TOL
C180 = C1608X5R0J106M_C180: User Part Number: .PARTNO; Tolerance: .TOL
C181 = C1005X5R1H104K_C181: User Part Number: .PARTNO; Tolerance: .TOL
C182 = C1005X7R1C103K_C182: User Part Number: .PARTNO; Tolerance: .TOL
C183 = C1005X7R1C103K_C183: User Part Number: .PARTNO; Tolerance: .TOL
C184 = C1005X7R1C103K_C184: User Part Number: .PARTNO; Tolerance: .TOL
C185 = C1005X7R1C103K_C185: User Part Number: .PARTNO; Tolerance: .TOL
C186 = C1608X5R0J106M_C186: User Part Number: .PARTNO; Tolerance: .TOL
C187 = C1005X5R1H104K_C187: User Part Number: .PARTNO; Tolerance: .TOL
C188 = C1005X7R1C103K_C188: User Part Number: .PARTNO; Tolerance: .TOL
C189 = C1005X7R1C103K_C189: User Part Number: .PARTNO; Tolerance: .TOL
C190 = C1005X5R1H104K_C190: User Part Number: .PARTNO; Tolerance: .TOL
C191 = C1608X5R0J106M_C191: User Part Number: .PARTNO; Tolerance: .TOL
C192 = C1005X5R1H104K_C192: User Part Number: .PARTNO; Tolerance: .TOL
C193 = C1005X7R1C103K_C193: User Part Number: .PARTNO; Tolerance: .TOL
C194 = C1608X5R0J106M_C194: User Part Number: .PARTNO; Tolerance: .TOL
C195 = C1005X5R1H104K_C195: User Part Number: .PARTNO; Tolerance: .TOL
C196 = C1005X7R1C103K_C196: User Part Number: .PARTNO; Tolerance: .TOL
C197 = C1005X7R1C103K_C197: User Part Number: .PARTNO; Tolerance: .TOL
C198 = C1005X7R1C103K_C198: User Part Number: .PARTNO; Tolerance: .TOL
C199 = C1608X5R0J106M_C199: User Part Number: .PARTNO; Tolerance: .TOL
C200 = C1005X7R1C103K_C200: User Part Number: .PARTNO; Tolerance: .TOL
C201 = C1005X7R1C103K_C201: User Part Number: .PARTNO; Tolerance: .TOL
C202 = C1005X7R1C103K_C202: User Part Number: .PARTNO; Tolerance: .TOL
C203 = C1005X5R1H104K_C203: User Part Number: .PARTNO; Tolerance: .TOL
C204 = C1608X5R0J106M_C204: User Part Number: .PARTNO; Tolerance: .TOL
C205 = C1005X5R1H104K_C205: User Part Number: .PARTNO; Tolerance: .TOL
C206 = C1005X5R1C105K_C206: User Part Number: .PARTNO; Tolerance: .TOL
C207 = C1005X5R1C105K_C207: User Part Number: .PARTNO; Tolerance: .TOL
C211 = C1005X5R1H104K_C211: User Part Number: .PARTNO; Tolerance: .TOL
C212 = C1005X5R1H104K_C212: User Part Number: .PARTNO; Tolerance: .TOL
C218 = C1005X7R1C103K_C218: User Part Number: .PARTNO; Tolerance: .TOL
C219 = C1005X5R1H104K_C219: User Part Number: .PARTNO; Tolerance: .TOL
C221 = C1608X5R0J106M_C221: User Part Number: .PARTNO; Tolerance: .TOL
C222 = C1608X5R0J106M_C222: User Part Number: .PARTNO; Tolerance: .TOL
C223 = C1608X5R0J106M_C223: User Part Number: .PARTNO; Tolerance: .TOL
C224 = C1005X5R1H104K_C224: User Part Number: .PARTNO; Tolerance: .TOL
C225 = C1005X5R1C105K_C225: User Part Number: .PARTNO; Tolerance: .TOL
C226 = C1005X5R1C105K_C226: User Part Number: .PARTNO; Tolerance: .TOL
C230 = C1005X5R1H104K_C230: User Part Number: .PARTNO; Tolerance: .TOL
C231 = C1005X5R1H104K_C231: User Part Number: .PARTNO; Tolerance: .TOL
C237 = C1005X7R1C103K_C237: User Part Number: .PARTNO; Tolerance: .TOL
C238 = C1005X5R1H104K_C238: User Part Number: .PARTNO; Tolerance: .TOL
C239 = C1005X5R1H104K_C239: User Part Number: .PARTNO; Tolerance: .TOL
C240 = C1005X5R1H104K_C240: User Part Number: .PARTNO; Tolerance: .TOL
C242 = C1005X5R1H104K_C242: User Part Number: .PARTNO; Tolerance: .TOL
C243 = C1005X5R1A475M_C243: User Part Number: .PARTNO; Tolerance: .TOL
C244 = C1005X5R1A475M_C244: User Part Number: .PARTNO; Tolerance: .TOL
C245 = C1005X5R1A475M_C245: User Part Number: .PARTNO; Tolerance: .TOL
C246 = C1005X5R1A475M_C246: User Part Number: .PARTNO; Tolerance: .TOL
C247 = C1005X5R1A475M_C247: User Part Number: .PARTNO; Tolerance: .TOL
C248 = C1005X7R1C103K_C248: User Part Number: .PARTNO; Tolerance: .TOL
C249 = C1005X7R1C103K_C249: User Part Number: .PARTNO; Tolerance: .TOL
C250 C251 C253-C255 C257 C258 = GRM31CR6YA106KA12L: User Part Number: .PARTNO; Tolerance: .TOL
C252 C256 = GRM21BR71H105KA12L: User Part Number: .PARTNO; Tolerance: .TOL
C259-C268 = C3216X5R1A107M: User Part Number: .PARTNO; Tolerance: .TOL
D1 = RB751V-40-TP_D1: User Part Number: .PARTNO; Tolerance: .TOL
D2 = LG L29K-G2J1-24-Z_D2: User Part Number: .PARTNO; Tolerance: .TOL
D3 = LO L29K-H2K1-24-Z_D3: User Part Number: .PARTNO; Tolerance: .TOL
FB1 = BLM18SG221TN1D_FB1: User Part Number: .PARTNO; Tolerance: .TOL
FB2 = BLM18SG221TN1D_FB2: User Part Number: .PARTNO; Tolerance: .TOL
FB3 = BLM18KG101TN1D_FB3: User Part Number: .PARTNO; Tolerance: .TOL
FB4 = BLM18KG101TN1D_FB4: User Part Number: .PARTNO; Tolerance: .TOL
FB5 = BLM15AX601SN1D_FB5: User Part Number: .PARTNO; Tolerance: .TOL
FB6 = BLM18KG101TN1D_FB6: User Part Number: .PARTNO; Tolerance: .TOL
FB7 = BLM18KG101TN1D_FB7: User Part Number: .PARTNO; Tolerance: .TOL
FB8 = BLM18SG221TN1D_FB8: User Part Number: .PARTNO; Tolerance: .TOL
J1 J2 = QSH-030-01-L-D-A: User Part Number: .PARTNO; Tolerance: .TOL
L2 L4 L5 = IHLP2525CZER3R3M01: User Part Number: .PARTNO; Tolerance: .TOL
L3 = VLCF4020T-100MR85_L3: User Part Number: .PARTNO; Tolerance: .TOL
L6 = IHLP2525CZER4R7M01: User Part Number: .PARTNO; Tolerance: .TOL
MH1-MH4 = MH_5MMC_2.2MMD: User Part Number: .PARTNO; Tolerance: .TOL
Q1 = 2N7002BKW,115_Q1: User Part Number: .PARTNO; Tolerance: .TOL
Q2 = 2N7002BKW,115_Q2: User Part Number: .PARTNO; Tolerance: .TOL
Q3 = SI4816BDY-T1-GE3_Q3: User Part Number: .PARTNO; Tolerance: .TOL
Q4 = SI4816BDY-T1-GE3_Q4: User Part Number: .PARTNO; Tolerance: .TOL
Q5 = 2N7002BKW,115_Q5: User Part Number: .PARTNO; Tolerance: .TOL
Q6 = SI4816BDY-T1-GE3_Q6: User Part Number: .PARTNO; Tolerance: .TOL
Q7 = SI4816BDY-T1-GE3_Q7: User Part Number: .PARTNO; Tolerance: .TOL
Q8 = 2N7002BKW,115_Q8: User Part Number: .PARTNO; Tolerance: .TOL
Q9 = 2N7002BKW,115_Q9: User Part Number: .PARTNO; Tolerance: .TOL
R1 = RC0402FR-0722RL_R1: User Part Number: .PARTNO; Tolerance: .TOL
R2 = CRCW0402200RFKED_R2: User Part Number: .PARTNO; Tolerance: .TOL
R3 = CRCW0402200RFKED_R3: User Part Number: .PARTNO; Tolerance: .TOL
R4 = RMCF0402FT240R_R4: User Part Number: .PARTNO; Tolerance: .TOL
R5 = RMCF0402FT240R_R5: User Part Number: .PARTNO; Tolerance: .TOL
R8 = RMCF0402FT240R_R8: User Part Number: .PARTNO; Tolerance: .TOL
R9 = RMCF0402FT240R_R9: User Part Number: .PARTNO; Tolerance: .TOL
R10 = RMCF0402FT240R_R10: User Part Number: .PARTNO; Tolerance: .TOL
R11 = RMCF0402FT240R_R11: User Part Number: .PARTNO; Tolerance: .TOL
R12 = RMCF0402FT240R_R12: User Part Number: .PARTNO; Tolerance: .TOL
R13 = RC0402JR-070RL_R13: User Part Number: .PARTNO; Tolerance: .TOL
R14 = RC0402JR-070RL_R14: User Part Number: .PARTNO; Tolerance: .TOL
R15 = CRCW0402200RFKED_R15: User Part Number: .PARTNO; Tolerance: .TOL
R16 = RC0402FR-0749R9L_R16: User Part Number: .PARTNO; Tolerance: .TOL
R17 = RC0402FR-0749R9L_R17: User Part Number: .PARTNO; Tolerance: .TOL
R18 = RC0402JR-070RL_R18: User Part Number: .PARTNO; Tolerance: .TOL
R19 = RC0402JR-070RL_R19: User Part Number: .PARTNO; Tolerance: .TOL
R20 = CRCW0402191RFKED_R20: User Part Number: .PARTNO; Tolerance: .TOL
R21 = RC0402FR-0747KL_R21: User Part Number: .PARTNO; Tolerance: .TOL
R22 = RC0402FR-0747KL_R22: User Part Number: .PARTNO; Tolerance: .TOL
R23 = RC0402JR-070RL_R23: User Part Number: .PARTNO; Tolerance: .TOL
R24 = RC0402JR-070RL_R24: User Part Number: .PARTNO; Tolerance: .TOL
R25 = RC0402JR-070RL_R25: User Part Number: .PARTNO; Tolerance: .TOL
R26 = RC0402JR-070RL_R26: User Part Number: .PARTNO; Tolerance: .TOL
R27 = RC0402JR-070RL_R27: User Part Number: .PARTNO; Tolerance: .TOL
R28 = RMCF0402FT4K99_R28: User Part Number: .PARTNO; Tolerance: .TOL
R29 = RMCF0402FT4K99_R29: User Part Number: .PARTNO; Tolerance: .TOL
R30 = ERJ-2RKF1601X_R30: User Part Number: .PARTNO; Tolerance: .TOL
R31 = RMCF0402FT4K99_R31: User Part Number: .PARTNO; Tolerance: .TOL
R32 = RMCF0402FT4K99_R32: User Part Number: .PARTNO; Tolerance: .TOL
R34 = RC0402JR-070RL_R34: User Part Number: .PARTNO; Tolerance: .TOL
R35 = RC0402FR-0722RL_R35: User Part Number: .PARTNO; Tolerance: .TOL
R36 = RC0402FR-0722RL_R36: User Part Number: .PARTNO; Tolerance: .TOL
R37 = CRCW04022M20FKED_R37: User Part Number: .PARTNO; Tolerance: .TOL
R44 = RMCF0402FT4K99_R44: User Part Number: .PARTNO; Tolerance: .TOL
R45 = RMCF0402FT4K99_R45: User Part Number: .PARTNO; Tolerance: .TOL
R46 = RMCF0402FT4K99_R46: User Part Number: .PARTNO; Tolerance: .TOL
R47 = RMCF0402FT4K99_R47: User Part Number: .PARTNO; Tolerance: .TOL
R50 = RC0402FR-0722RL_R50: User Part Number: .PARTNO; Tolerance: .TOL
R51 = RC0402JR-070RL_R51: User Part Number: .PARTNO; Tolerance: .TOL
R52 = RC0402FR-0722RL_R52: User Part Number: .PARTNO; Tolerance: .TOL
R53 = CRCW040210M0FKED_R53: User Part Number: .PARTNO; Tolerance: .TOL
R54 = CRCW040210M0FKED_R54: User Part Number: .PARTNO; Tolerance: .TOL
R55 = RMCF0402FT4K99_R55: User Part Number: .PARTNO; Tolerance: .TOL
R56 = RMCF0402FT4K99_R56: User Part Number: .PARTNO; Tolerance: .TOL
R59 = RMCF0402FT4K99_R59: User Part Number: .PARTNO; Tolerance: .TOL
R61 = RC0402FR-071KL_R61: User Part Number: .PARTNO; Tolerance: .TOL
R65 = RC0402JR-070RL_R65: User Part Number: .PARTNO; Tolerance: .TOL
R66 = RC0402FR-0722RL_R66: User Part Number: .PARTNO; Tolerance: .TOL
R70 = RC0402JR-070RL_R70: User Part Number: .PARTNO; Tolerance: .TOL
R71 = RC0402JR-070RL_R71: User Part Number: .PARTNO; Tolerance: .TOL
R72 = RC0402FR-0722RL_R72: User Part Number: .PARTNO; Tolerance: .TOL
R73 = RMCF0402FT100K_R73: User Part Number: .PARTNO; Tolerance: .TOL
R74 = RC0402JR-070RL_R74: User Part Number: .PARTNO; Tolerance: .TOL
R76 = RC0402JR-070RL_R76: User Part Number: .PARTNO; Tolerance: .TOL
R77 = CRCW04022R20FKED_R77: User Part Number: .PARTNO; Tolerance: .TOL
R78 = RC0402JR-070RL_R78: User Part Number: .PARTNO; Tolerance: .TOL
R80 = RC0402JR-070RL_R80: User Part Number: .PARTNO; Tolerance: .TOL
R81 = RC0402FR-07220RL_R81: User Part Number: .PARTNO; Tolerance: .TOL
R82 = RC0402FR-07220RL_R82: User Part Number: .PARTNO; Tolerance: .TOL
R83 = RC0402FR-0722RL_R83: User Part Number: .PARTNO; Tolerance: .TOL
R84 = RMCF0402FT4K99_R84: User Part Number: .PARTNO; Tolerance: .TOL
R85 = RC0402FR-0722RL_R85: User Part Number: .PARTNO; Tolerance: .TOL
R86 = RC0402FR-0722RL_R86: User Part Number: .PARTNO; Tolerance: .TOL
R87 = RMCF0402FT4K99_R87: User Part Number: .PARTNO; Tolerance: .TOL
R88 = RC0402JR-070RL_R88: User Part Number: .PARTNO; Tolerance: .TOL
R89 = RMCF0402FT4K99_R89: User Part Number: .PARTNO; Tolerance: .TOL
R90 = RC0402FR-0722RL_R90: User Part Number: .PARTNO; Tolerance: .TOL
R92 = RC0402FR-0722RL_R92: User Part Number: .PARTNO; Tolerance: .TOL
R93 = RC0402JR-070RL_R93: User Part Number: .PARTNO; Tolerance: .TOL
R99 = RC0402FR-071KL_R99: User Part Number: .PARTNO; Tolerance: .TOL
R101 = RC0402FR-071KL_R101: User Part Number: .PARTNO; Tolerance: .TOL
R102 = RC0402FR-071KL_R102: User Part Number: .PARTNO; Tolerance: .TOL
R105 = RC0402JR-070RL_R105: User Part Number: .PARTNO; Tolerance: .TOL
R106 = RC0402JR-070RL_R106: User Part Number: .PARTNO; Tolerance: .TOL
R107 = RC0402JR-070RL_R107: User Part Number: .PARTNO; Tolerance: .TOL
R108 = RC0402JR-070RL_R108: User Part Number: .PARTNO; Tolerance: .TOL
R111 = RMCF0402FT100K_R111: User Part Number: .PARTNO; Tolerance: .TOL
R112 = RC0402FR-0722RL_R112: User Part Number: .PARTNO; Tolerance: .TOL
R113 = RC0402FR-07220RL_R113: User Part Number: .PARTNO; Tolerance: .TOL
R114 = RC0402FR-07220RL_R114: User Part Number: .PARTNO; Tolerance: .TOL
R116 = RC0402JR-070RL_R116: User Part Number: .PARTNO; Tolerance: .TOL
R117 = RC0402JR-070RL_R117: User Part Number: .PARTNO; Tolerance: .TOL
R119 = RC0402FR-0714KL_R119: User Part Number: .PARTNO; Tolerance: .TOL
R120 = RMCF0402FT4K99_R120: User Part Number: .PARTNO; Tolerance: .TOL
R121 = RC0402FR-071RL_R121: User Part Number: .PARTNO; Tolerance: .TOL
R122 = RC0402FR-071RL_R122: User Part Number: .PARTNO; Tolerance: .TOL
R123 = RC0402FR-0739KL_R123: User Part Number: .PARTNO; Tolerance: .TOL
R124 = RC0402FR-07200KL_R124: User Part Number: .PARTNO; Tolerance: .TOL
R125 = RC0402FR-07200KL_R125: User Part Number: .PARTNO; Tolerance: .TOL
R126 = CRCW040210K5FKED_R126: User Part Number: .PARTNO; Tolerance: .TOL
R128 = RC0402JR-070RL_R128: User Part Number: .PARTNO; Tolerance: .TOL
R134 = RC0402FR-0712KL_R134: User Part Number: .PARTNO; Tolerance: .TOL
R135 = RC0402FR-073K3L_R135: User Part Number: .PARTNO; Tolerance: .TOL
R137 = RMCF0402FT100K_R137: User Part Number: .PARTNO; Tolerance: .TOL
R138 = CRCW0402330KFKED_R138: User Part Number: .PARTNO; Tolerance: .TOL
R139 = RC0402FR-07120KL_R139: User Part Number: .PARTNO; Tolerance: .TOL
R140 = RC0402JR-070RL_R140: User Part Number: .PARTNO; Tolerance: .TOL
R141 = RC0402JR-070RL_R141: User Part Number: .PARTNO; Tolerance: .TOL
R143 = RMCF0402FT100K_R143: User Part Number: .PARTNO; Tolerance: .TOL
R144 = RMCF0402FT100K_R144: User Part Number: .PARTNO; Tolerance: .TOL
R145 = RC0402FR-071RL_R145: User Part Number: .PARTNO; Tolerance: .TOL
R146 = RC0402FR-071RL_R146: User Part Number: .PARTNO; Tolerance: .TOL
R147 = RC0402FR-0727KL_R147: User Part Number: .PARTNO; Tolerance: .TOL
R148 = RC0402FR-07200KL_R148: User Part Number: .PARTNO; Tolerance: .TOL
R149 = RC0402FR-07200KL_R149: User Part Number: .PARTNO; Tolerance: .TOL
R150 = CRCW040210K5FKED_R150: User Part Number: .PARTNO; Tolerance: .TOL
R152 = RC0402JR-070RL_R152: User Part Number: .PARTNO; Tolerance: .TOL
R156 = RC0402JR-070RL_R156: User Part Number: .PARTNO; Tolerance: .TOL
R157 = RC0402JR-070RL_R157: User Part Number: .PARTNO; Tolerance: .TOL
R159 = RC0402FR-0722RL_R159: User Part Number: .PARTNO; Tolerance: .TOL
R160 = RC0402FR-0722RL_R160: User Part Number: .PARTNO; Tolerance: .TOL
R161 = RC0402FR-0722RL_R161: User Part Number: .PARTNO; Tolerance: .TOL
R162 = RC0402FR-071KL_R162: User Part Number: .PARTNO; Tolerance: .TOL
R163 = RC0402JR-070RL_R163: User Part Number: .PARTNO; Tolerance: .TOL
R164 = RC0402JR-070RL_R164: User Part Number: .PARTNO; Tolerance: .TOL
R165-R213 = RC0402FR-0710KL: User Part Number: .PARTNO; Tolerance: .TOL
TP3 = TP_25MILC_TP3: User Part Number: .PARTNO; Tolerance: .TOL
TP5 = TP_25MILC_TP5: User Part Number: .PARTNO; Tolerance: .TOL
TP6 = TP_25MILC_TP6: User Part Number: .PARTNO; Tolerance: .TOL
TP7 = TP_25MILC_TP7: User Part Number: .PARTNO; Tolerance: .TOL
TP8 = TP_25MILC_TP8: User Part Number: .PARTNO; Tolerance: .TOL
TP9 = TP_25MILC_TP9: User Part Number: .PARTNO; Tolerance: .TOL
TP10 = TP_25MILC_TP10: User Part Number: .PARTNO; Tolerance: .TOL
TP11 = TP_25MILC_TP11: User Part Number: .PARTNO; Tolerance: .TOL
U1 = MCIMX6Q5EYM10AC_U1: User Part Number: .PARTNO; Tolerance: .TOL
U2-U5 = MT41J128M16HA15EDTR: User Part Number: .PARTNO; Tolerance: .TOL
U6 = TPS3808G09DBVR_U6: User Part Number: .PARTNO; Tolerance: .TOL
U7 = SN74AHC1G09DBVR_U7: User Part Number: .PARTNO; Tolerance: .TOL
U8 = KSZ9021RN_U8: User Part Number: .PARTNO; Tolerance: .TOL
U9 = MIC33050-4YHL TR_U9: User Part Number: .PARTNO; Tolerance: .TOL
U10 = SST25VF016B-75-4I-QAF_U10: User Part Number: .PARTNO; Tolerance: .TOL
U11 = ISL6236AIRZ_U11: User Part Number: .PARTNO; Tolerance: .TOL
U12 = TPS62175DQCT_U12: User Part Number: .PARTNO; Tolerance: .TOL
U13 = ISL6236AIRZ_U13: User Part Number: .PARTNO; Tolerance: .TOL
Y1 = ABM7-24.000MHZ-D-2-Y-T_Y1: User Part Number: .PARTNO; Tolerance: .TOL
Y2 = ABS06-32.768KHZ-9-1-T_Y2: User Part Number: .PARTNO; Tolerance: .TOL
Y3 = ABM7-25.000MHZ-D-2-Y-T V1.1_Y3: User Part Number: .PARTNO; Tolerance: .TOL

## Footprints (pads in the part's own frame, mm; a bottom-side part is the same pattern mirrored in y, then rotated)
8_SOIC_3_9MM
  rect 1.2x0.58 smd: 1(-2.8,1.905) 2(-2.8,0.635) 3(-2.8,-0.635) 4(-2.8,-1.905) 5(2.8,-1.905) 6(2.8,-0.635) 7(2.8,0.635) 8(2.8,1.905)
32_VFQFN_EXPOSED_PAD
  rect 0.6x0.23 smd: 1(-2.4,1.75) 2(-2.4,1.25) 3(-2.4,0.75) 4(-2.4,0.25) 5(-2.4,-0.25) 6(-2.4,-0.75) 7(-2.4,-1.25) 8(-2.4,-1.75) 17(2.4,-1.75) 18(2.4,-1.25) 19(2.4,-0.75) 20(2.4,-0.25) 21(2.4,0.25) 22(2.4,0.75) 23(2.4,1.25) 24(2.4,1.75)
  rect 0.23x0.6 smd: 9(-1.75,-2.4) 10(-1.25,-2.4) 11(-0.75,-2.4) 12(-0.25,-2.4) 13(0.25,-2.4) 14(0.75,-2.4) 15(1.25,-2.4) 16(1.75,-2.4) 25(1.75,2.4) 26(1.25,2.4) 27(0.75,2.4) 28(0.25,2.4) 29(-0.25,2.4) 30(-0.75,2.4) 31(-1.25,2.4) 32(-1.75,2.4)
  rect 3.3x3.3 smd: 33(0,0)
96_FPGA_DD3
  round 0.35 smd: A1(-3.2,6) A2(-2.4,6) A3(-1.6,6) A7(1.6,6) A8(2.4,6) A9(3.2,6) B1(-3.2,5.2) B2(-2.4,5.2) B3(-1.6,5.2) B7(1.6,5.2) B8(2.4,5.2) B9(3.2,5.2) C1(-3.2,4.4) C2(-2.4,4.4) C3(-1.6,4.4) C7(1.6,4.4) C8(2.4,4.4) C9(3.2,4.4) D1(-3.2,3.6) D2(-2.4,3.6) D3(-1.6,3.6) D7(1.6,3.6) D8(2.4,3.6) D9(3.2,3.6) E1(-3.2,2.8) E2(-2.4,2.8) E3(-1.6,2.8) E7(1.6,2.8) E8(2.4,2.8) E9(3.2,2.8) F1(-3.2,2) F2(-2.4,2) F3(-1.6,2) F7(1.6,2) F8(2.4,2) F9(3.2,2) G1(-3.2,1.2) G2(-2.4,1.2) G3(-1.6,1.2) G7(1.6,1.2) G8(2.4,1.2) G9(3.2,1.2) H1(-3.2,0.4) H2(-2.4,0.4) H3(-1.6,0.4) H7(1.6,0.4) H8(2.4,0.4) H9(3.2,0.4) J1(-3.2,-0.4) J2(-2.4,-0.4) J3(-1.6,-0.4) J7(1.6,-0.4) J8(2.4,-0.4) J9(3.2,-0.4) K1(-3.2,-1.2) K2(-2.4,-1.2) K3(-1.6,-1.2) K7(1.6,-1.2) K8(2.4,-1.2) K9(3.2,-1.2) L1(-3.2,-2) L2(-2.4,-2) L3(-1.6,-2) L7(1.6,-2) L8(2.4,-2) L9(3.2,-2) M1(-3.2,-2.8) M2(-2.4,-2.8) M3(-1.6,-2.8) M7(1.6,-2.8) M8(2.4,-2.8) M9(3.2,-2.8) MECH01(-4,8.4) MECH02(-3.2,8.4) MECH03(-1.6,8.4) MECH04(1.6,8.4) MECH05(3.2,8.4) MECH06(4,8.4) MECH07(-4,6) MECH08(4,6) MECH09(-4,-6) MECH10(4,-6) MECH11(-4,-8.4) MECH12(-3.2,-8.4) MECH13(-1.6,-8.4) MECH14(1.6,-8.4) MECH15(3.2,-8.4) MECH16(4,-8.4) N1(-3.2,-3.6) N2(-2.4,-3.6) N3(-1.6,-3.6) N7(1.6,-3.6) N8(2.4,-3.6) N9(3.2,-3.6) P1(-3.2,-4.4) P2(-2.4,-4.4) P3(-1.6,-4.4) P7(1.6,-4.4) P8(2.4,-4.4) P9(3.2,-4.4) R1(-3.2,-5.2) R2(-2.4,-5.2) R3(-1.6,-5.2) R7(1.6,-5.2) R8(2.4,-5.2) R9(3.2,-5.2) T1(-3.2,-6) T2(-2.4,-6) T3(-1.6,-6) T7(1.6,-6) T8(2.4,-6) T9(3.2,-6)
ABM7_V1_1
  rect 1.9x2.6 smd: 1(-2.15,0) 2(2.15,0)
ABS06
  rect 0.75x1.4 smd: 1(-0.725,0) 2(0.725,0)
C0402
  rect 0.5x0.5 smd: 1(-0.5,0) 2(0.5,0)
C0603
  rect 0.8x0.8 smd: 1(-0.75,0) 2(0.75,0)
C0805
  rect 0.9x1.3 smd: 1(-0.95,0) 2(0.95,0)
C1206
  rect 0.9x1.6 smd: 1(-1.55,0) 2(1.55,0)
DBV_SOT_23_5
  rect 1x0.55 smd: 1(-1.35,0.95) 2(-1.35,0) 3(-1.35,-0.95) 4(1.35,-0.95) 5(1.35,0.95)
DBV_SOT_23_6
  rect 1x0.55 smd: 1(-1.35,0.95) 2(-1.35,0) 3(-1.35,-0.95) 4(1.35,-0.95) 5(1.35,0) 6(1.35,0.95)
DQC_PWSON-N10
  rect 0.5x0.25 smd: 1(-0.95,1) 2(-0.95,0.5) 3(-0.95,0) 4(-0.95,-0.5) 5(-0.95,-1) 6(0.95,-1) 7(0.95,-0.5) 8(0.95,0) 9(0.95,0.5) 10(0.95,1)
  rect 0.84x2.4 smd: 11(0,0)
IHLP_255MILX270MIL
  rect 1.829x3.429 smd: 1(-2.769,0) 2(2.769,0)
LED_0603
  rect 0.8x0.8 smd: 1(-0.8,0) 2(0.8,0)
MH_5MMD_2_2MMD
  round 5 hole 2.2: 1(0,0)
MLF_3X3_12PINS
  rect 0.48x0.23 smd: 1(-1.36,1.25) 2(-1.36,0.75) 3(-1.36,0.25) 4(-1.36,-0.25) 5(-1.36,-0.75) 6(-1.36,-1.25) 7(1.36,-1.25) 8(1.36,-0.75) 9(1.36,-0.25) 10(1.36,0.25) 11(1.36,0.75) 12(1.36,1.25)
  rect 1.8x1.125 smd: 13(0,0.699)
  rect 0.4x1.19 smd: 14(-0.77,-0.73)
  rect 0.9x1.19 smd: 15(0.45,-0.73)
PBGA624
  round 0.4 smd: A2(-8.8,9.6) A3(-8,9.6) A4(-7.2,9.6) A5(-6.4,9.6) A6(-5.6,9.6) A7(-4.8,9.6) A8(-4,9.6) A9(-3.2,9.6) A10(-2.4,9.6) A11(-1.6,9.6) A12(-0.8,9.6) A13(0,9.6) A14(0.8,9.6) A15(1.6,9.6) A16(2.4,9.6) A17(3.2,9.6) A18(4,9.6) A19(4.8,9.6) A20(5.6,9.6) A21(6.4,9.6) A22(7.2,9.6) A23(8,9.6) A24(8.8,9.6) A25(9.6,9.6) AA1(-9.6,-6.4) AA2(-8.8,-6.4) AA3(-8,-6.4) AA4(-7.2,-6.4) AA5(-6.4,-6.4) AA6(-5.6,-6.4) AA7(-4.8,-6.4) AA8(-4,-6.4) AA9(-3.2,-6.4) AA10(-2.4,-6.4) AA11(-1.6,-6.4) AA12(-0.8,-6.4) AA13(0,-6.4) AA14(0.8,-6.4) AA15(1.6,-6.4) AA16(2.4,-6.4) AA17(3.2,-6.4) AA18(4,-6.4) AA19(4.8,-6.4) AA20(5.6,-6.4) AA21(6.4,-6.4) AA22(7.2,-6.4) AA23(8,-6.4) AA24(8.8,-6.4) AA25(9.6,-6.4) AB1(-9.6,-7.2) AB2(-8.8,-7.2) AB3(-8,-7.2) AB4(-7.2,-7.2) AB5(-6.4,-7.2) AB6(-5.6,-7.2) AB7(-4.8,-7.2) AB8(-4,-7.2) AB9(-3.2,-7.2) AB10(-2.4,-7.2) AB11(-1.6,-7.2) AB12(-0.8,-7.2) AB13(0,-7.2) AB14(0.8,-7.2) AB15(1.6,-7.2) AB16(2.4,-7.2) AB17(3.2,-7.2) AB18(4,-7.2) AB19(4.8,-7.2) AB20(5.6,-7.2) AB21(6.4,-7.2) AB22(7.2,-7.2) AB23(8,-7.2) AB24(8.8,-7.2) AB25(9.6,-7.2) AC1(-9.6,-8) AC2(-8.8,-8) AC3(-8,-8) AC4(-7.2,-8) AC5(-6.4,-8) AC6(-5.6,-8) AC7(-4.8,-8) AC8(-4,-8) AC9(-3.2,-8) AC10(-2.4,-8) AC11(-1.6,-8) AC12(-0.8,-8) AC13(0,-8) AC14(0.8,-8) AC15(1.6,-8) AC16(2.4,-8) AC17(3.2,-8) AC18(4,-8) AC19(4.8,-8) AC20(5.6,-8) AC21(6.4,-8) AC22(7.2,-8) AC23(8,-8) AC24(8.8,-8) AC25(9.6,-8) AD1(-9.6,-8.8) AD2(-8.8,-8.8) AD3(-8,-8.8) AD4(-7.2,-8.8) AD5(-6.4,-8.8) AD6(-5.6,-8.8) AD7(-4.8,-8.8) AD8(-4,-8.8) AD9(-3.2,-8.8) AD10(-2.4,-8.8) AD11(-1.6,-8.8) AD12(-0.8,-8.8) AD13(0,-8.8) AD14(0.8,-8.8) AD15(1.6,-8.8) AD16(2.4,-8.8) AD17(3.2,-8.8) AD18(4,-8.8) AD19(4.8,-8.8) AD20(5.6,-8.8) AD21(6.4,-8.8) AD22(7.2,-8.8) AD23(8,-8.8) AD24(8.8,-8.8) AD25(9.6,-8.8) AE1(-9.6,-9.6) AE2(-8.8,-9.6) AE3(-8,-9.6) AE4(-7.2,-9.6) AE5(-6.4,-9.6) AE6(-5.6,-9.6) AE7(-4.8,-9.6) AE8(-4,-9.6) AE9(-3.2,-9.6) AE10(-2.4,-9.6) AE11(-1.6,-9.6) AE12(-0.8,-9.6) AE13(0,-9.6) AE14(0.8,-9.6) AE15(1.6,-9.6) AE16(2.4,-9.6) AE17(3.2,-9.6) AE18(4,-9.6) AE19(4.8,-9.6) AE20(5.6,-9.6) AE21(6.4,-9.6) AE22(7.2,-9.6) AE23(8,-9.6) AE24(8.8,-9.6) AE25(9.6,-9.6) B1(-9.6,8.8) B2(-8.8,8.8) B3(-8,8.8) B4(-7.2,8.8) B5(-6.4,8.8) B6(-5.6,8.8) B7(-4.8,8.8) B8(-4,8.8) B9(-3.2,8.8) B10(-2.4,8.8) B11(-1.6,8.8) B12(-0.8,8.8) B13(0,8.8) B14(0.8,8.8) B15(1.6,8.8) B16(2.4,8.8) B17(3.2,8.8) B18(4,8.8) B19(4.8,8.8) B20(5.6,8.8) B21(6.4,8.8) B22(7.2,8.8) B23(8,8.8) B24(8.8,8.8) B25(9.6,8.8) C1(-9.6,8) C2(-8.8,8) C3(-8,8) C4(-7.2,8) C5(-6.4,8) C6(-5.6,8) C7(-4.8,8) C8(-4,8) C9(-3.2,8) C10(-2.4,8) C11(-1.6,8) C12(-0.8,8) C13(0,8) C14(0.8,8) C15(1.6,8) C16(2.4,8) C17(3.2,8) C18(4,8) C19(4.8,8) C20(5.6,8) C21(6.4,8) C22(7.2,8) C23(8,8) C24(8.8,8) C25(9.6,8) D1(-9.6,7.2) D2(-8.8,7.2) D3(-8,7.2) D4(-7.2,7.2) D5(-6.4,7.2) D6(-5.6,7.2) D7(-4.8,7.2) D8(-4,7.2) D9(-3.2,7.2) D10(-2.4,7.2) D11(-1.6,7.2) D12(-0.8,7.2) D13(0,7.2) D14(0.8,7.2) D15(1.6,7.2) D16(2.4,7.2) D17(3.2,7.2) D18(4,7.2) D19(4.8,7.2) D20(5.6,7.2) D21(6.4,7.2) D22(7.2,7.2) D23(8,7.2) D24(8.8,7.2) D25(9.6,7.2) E1(-9.6,6.4) E2(-8.8,6.4) E3(-8,6.4) E4(-7.2,6.4) E5(-6.4,6.4) E6(-5.6,6.4) E7(-4.8,6.4) E8(-4,6.4) E9(-3.2,6.4) E10(-2.4,6.4) E11(-1.6,6.4) E12(-0.8,6.4) E13(0,6.4) E14(0.8,6.4) E15(1.6,6.4) E16(2.4,6.4) E17(3.2,6.4) E18(4,6.4) E19(4.8,6.4) E20(5.6,6.4) E21(6.4,6.4) E22(7.2,6.4) E23(8,6.4) E24(8.8,6.4) E25(9.6,6.4) F1(-9.6,5.6) F2(-8.8,5.6) F3(-8,5.6) F4(-7.2,5.6) F5(-6.4,5.6) F6(-5.6,5.6) F7(-4.8,5.6) F8(-4,5.6) F9(-3.2,5.6) F10(-2.4,5.6) F11(-1.6,5.6) F12(-0.8,5.6) F13(0,5.6) F14(0.8,5.6) F15(1.6,5.6) F16(2.4,5.6) F17(3.2,5.6) F18(4,5.6) F19(4.8,5.6) F20(5.6,5.6) F21(6.4,5.6) F22(7.2,5.6) F23(8,5.6) F24(8.8,5.6) F25(9.6,5.6) G1(-9.6,4.8) G2(-8.8,4.8) G3(-8,4.8) G4(-7.2,4.8) G5(-6.4,4.8) G6(-5.6,4.8) G7(-4.8,4.8) G8(-4,4.8) G9(-3.2,4.8) G10(-2.4,4.8) G11(-1.6,4.8) G12(-0.8,4.8) G13(0,4.8) G14(0.8,4.8) G15(1.6,4.8) G16(2.4,4.8) G17(3.2,4.8) G18(4,4.8) G19(4.8,4.8) G20(5.6,4.8) G21(6.4,4.8) G22(7.2,4.8) G23(8,4.8) G24(8.8,4.8) G25(9.6,4.8) H1(-9.6,4) H2(-8.8,4) H3(-8,4) H4(-7.2,4) H5(-6.4,4) H6(-5.6,4) H7(-4.8,4) H8(-4,4) H9(-3.2,4) H10(-2.4,4) H11(-1.6,4) H12(-0.8,4) H13(0,4) H14(0.8,4) H15(1.6,4) H16(2.4,4) H17(3.2,4) H18(4,4) H19(4.8,4) H20(5.6,4) H21(6.4,4) H22(7.2,4) H23(8,4) H24(8.8,4) H25(9.6,4) J1(-9.6,3.2) J2(-8.8,3.2) J3(-8,3.2) J4(-7.2,3.2) J5(-6.4,3.2) J6(-5.6,3.2) J7(-4.8,3.2) J8(-4,3.2) J9(-3.2,3.2) J10(-2.4,3.2) J11(-1.6,3.2) J12(-0.8,3.2) J13(0,3.2) J14(0.8,3.2) J15(1.6,3.2) J16(2.4,3.2) J17(3.2,3.2) J18(4,3.2) J19(4.8,3.2) J20(5.6,3.2) J21(6.4,3.2) J22(7.2,3.2) J23(8,3.2) J24(8.8,3.2) J25(9.6,3.2) K1(-9.6,2.4) K2(-8.8,2.4) K3(-8,2.4) K4(-7.2,2.4) K5(-6.4,2.4) K6(-5.6,2.4) K7(-4.8,2.4) K8(-4,2.4) K9(-3.2,2.4) K10(-2.4,2.4) K11(-1.6,2.4) K12(-0.8,2.4) K13(0,2.4) K14(0.8,2.4) K15(1.6,2.4) K16(2.4,2.4) K17(3.2,2.4) K18(4,2.4) K19(4.8,2.4) K20(5.6,2.4) K21(6.4,2.4) K22(7.2,2.4) K23(8,2.4) K24(8.8,2.4) K25(9.6,2.4) L1(-9.6,1.6) L2(-8.8,1.6) L3(-8,1.6) L4(-7.2,1.6) L5(-6.4,1.6) L6(-5.6,1.6) L7(-4.8,1.6) L8(-4,1.6) L9(-3.2,1.6) L10(-2.4,1.6) L11(-1.6,1.6) L12(-0.8,1.6) L13(0,1.6) L14(0.8,1.6) L15(1.6,1.6) L16(2.4,1.6) L17(3.2,1.6) L18(4,1.6) L19(4.8,1.6) L20(5.6,1.6) L21(6.4,1.6) L22(7.2,1.6) L23(8,1.6) L24(8.8,1.6) L25(9.6,1.6) M1(-9.6,0.8) M2(-8.8,0.8) M3(-8,0.8) M4(-7.2,0.8) M5(-6.4,0.8) M6(-5.6,0.8) M7(-4.8,0.8) M8(-4,0.8) M9(-3.2,0.8) M10(-2.4,0.8) M11(-1.6,0.8) M12(-0.8,0.8) M13(0,0.8) M14(0.8,0.8) M15(1.6,0.8) M16(2.4,0.8) M17(3.2,0.8) M18(4,0.8) M19(4.8,0.8) M20(5.6,0.8) M21(6.4,0.8) M22(7.2,0.8) M23(8,0.8) M24(8.8,0.8) M25(9.6,0.8) N1(-9.6,0) N2(-8.8,0) N3(-8,0) N4(-7.2,0) N5(-6.4,0) N6(-5.6,0) N7(-4.8,0) N8(-4,0) N9(-3.2,0) N10(-2.4,0) N11(-1.6,0) N12(-0.8,0) N13(0,0) N14(0.8,0) N15(1.6,0) N16(2.4,0) N17(3.2,0) N18(4,0) N19(4.8,0) N20(5.6,0) N21(6.4,0) N22(7.2,0) N23(8,0) N24(8.8,0) N25(9.6,0) P1(-9.6,-0.8) P2(-8.8,-0.8) P3(-8,-0.8) P4(-7.2,-0.8) P5(-6.4,-0.8) P6(-5.6,-0.8) P7(-4.8,-0.8) P8(-4,-0.8) P9(-3.2,-0.8) P10(-2.4,-0.8) P11(-1.6,-0.8) P12(-0.8,-0.8) P13(0,-0.8) P14(0.8,-0.8) P15(1.6,-0.8) P16(2.4,-0.8) P17(3.2,-0.8) P18(4,-0.8) P19(4.8,-0.8) P20(5.6,-0.8) P21(6.4,-0.8) P22(7.2,-0.8) P23(8,-0.8) P24(8.8,-0.8) P25(9.6,-0.8) R1(-9.6,-1.6) R2(-8.8,-1.6) R3(-8,-1.6) R4(-7.2,-1.6) R5(-6.4,-1.6) R6(-5.6,-1.6) R7(-4.8,-1.6) R8(-4,-1.6) R9(-3.2,-1.6) R10(-2.4,-1.6) R11(-1.6,-1.6) R12(-0.8,-1.6) R13(0,-1.6) R14(0.8,-1.6) R15(1.6,-1.6) R16(2.4,-1.6) R17(3.2,-1.6) R18(4,-1.6) R19(4.8,-1.6) R20(5.6,-1.6) R21(6.4,-1.6) R22(7.2,-1.6) R23(8,-1.6) R24(8.8,-1.6) R25(9.6,-1.6) T1(-9.6,-2.4) T2(-8.8,-2.4) T3(-8,-2.4) T4(-7.2,-2.4) T5(-6.4,-2.4) T6(-5.6,-2.4) T7(-4.8,-2.4) T8(-4,-2.4) T9(-3.2,-2.4) T10(-2.4,-2.4) T11(-1.6,-2.4) T12(-0.8,-2.4) T13(0,-2.4) T14(0.8,-2.4) T15(1.6,-2.4) T16(2.4,-2.4) T17(3.2,-2.4) T18(4,-2.4) T19(4.8,-2.4) T20(5.6,-2.4) T21(6.4,-2.4) T22(7.2,-2.4) T23(8,-2.4) T24(8.8,-2.4) T25(9.6,-2.4) U1(-9.6,-3.2) U2(-8.8,-3.2) U3(-8,-3.2) U4(-7.2,-3.2) U5(-6.4,-3.2) U6(-5.6,-3.2) U7(-4.8,-3.2) U8(-4,-3.2) U9(-3.2,-3.2) U10(-2.4,-3.2) U11(-1.6,-3.2) U12(-0.8,-3.2) U13(0,-3.2) U14(0.8,-3.2) U15(1.6,-3.2) U16(2.4,-3.2) U17(3.2,-3.2) U18(4,-3.2) U19(4.8,-3.2) U20(5.6,-3.2) U21(6.4,-3.2) U22(7.2,-3.2) U23(8,-3.2) U24(8.8,-3.2) U25(9.6,-3.2) V1(-9.6,-4) V2(-8.8,-4) V3(-8,-4) V4(-7.2,-4) V5(-6.4,-4) V6(-5.6,-4) V7(-4.8,-4) V8(-4,-4) V9(-3.2,-4) V10(-2.4,-4) V11(-1.6,-4) V12(-0.8,-4) V13(0,-4) V14(0.8,-4) V15(1.6,-4) V16(2.4,-4) V17(3.2,-4) V18(4,-4) V19(4.8,-4) V20(5.6,-4) V21(6.4,-4) V22(7.2,-4) V23(8,-4) V24(8.8,-4) V25(9.6,-4) W1(-9.6,-4.8) W2(-8.8,-4.8) W3(-8,-4.8) W4(-7.2,-4.8) W5(-6.4,-4.8) W6(-5.6,-4.8) W7(-4.8,-4.8) W8(-4,-4.8) W9(-3.2,-4.8) W10(-2.4,-4.8) W11(-1.6,-4.8) W12(-0.8,-4.8) W13(0,-4.8) W14(0.8,-4.8) W15(1.6,-4.8) W16(2.4,-4.8) W17(3.2,-4.8) W18(4,-4.8) W19(4.8,-4.8) W20(5.6,-4.8) W21(6.4,-4.8) W22(7.2,-4.8) W23(8,-4.8) W24(8.8,-4.8) W25(9.6,-4.8) Y1(-9.6,-5.6) Y2(-8.8,-5.6) Y3(-8,-5.6) Y4(-7.2,-5.6) Y5(-6.4,-5.6) Y6(-5.6,-5.6) Y7(-4.8,-5.6) Y8(-4,-5.6) Y9(-3.2,-5.6) Y10(-2.4,-5.6) Y11(-1.6,-5.6) Y12(-0.8,-5.6) Y13(0,-5.6) Y14(0.8,-5.6) Y15(1.6,-5.6) Y16(2.4,-5.6) Y17(3.2,-5.6) Y18(4,-5.6) Y19(4.8,-5.6) Y20(5.6,-5.6) Y21(6.4,-5.6) Y22(7.2,-5.6) Y23(8,-5.6) Y24(8.8,-5.6) Y25(9.6,-5.6)
